# Altium PCB DUTBoard_Sandbox.PcbDoc (part 1 of 6)
Units mil, origin at the board's own origin, x right, y up, seen from the top; angles counter-clockwise.
Board outline 5475 x 5475 mil, 4 copper layers (Top Layer, Mid-Layer 1, Mid-Layer 2, Bottom Layer); 89 components, 507 nets, 1705 pads, 1204 vias.
Unrouted connection lines stored in the file: 6.
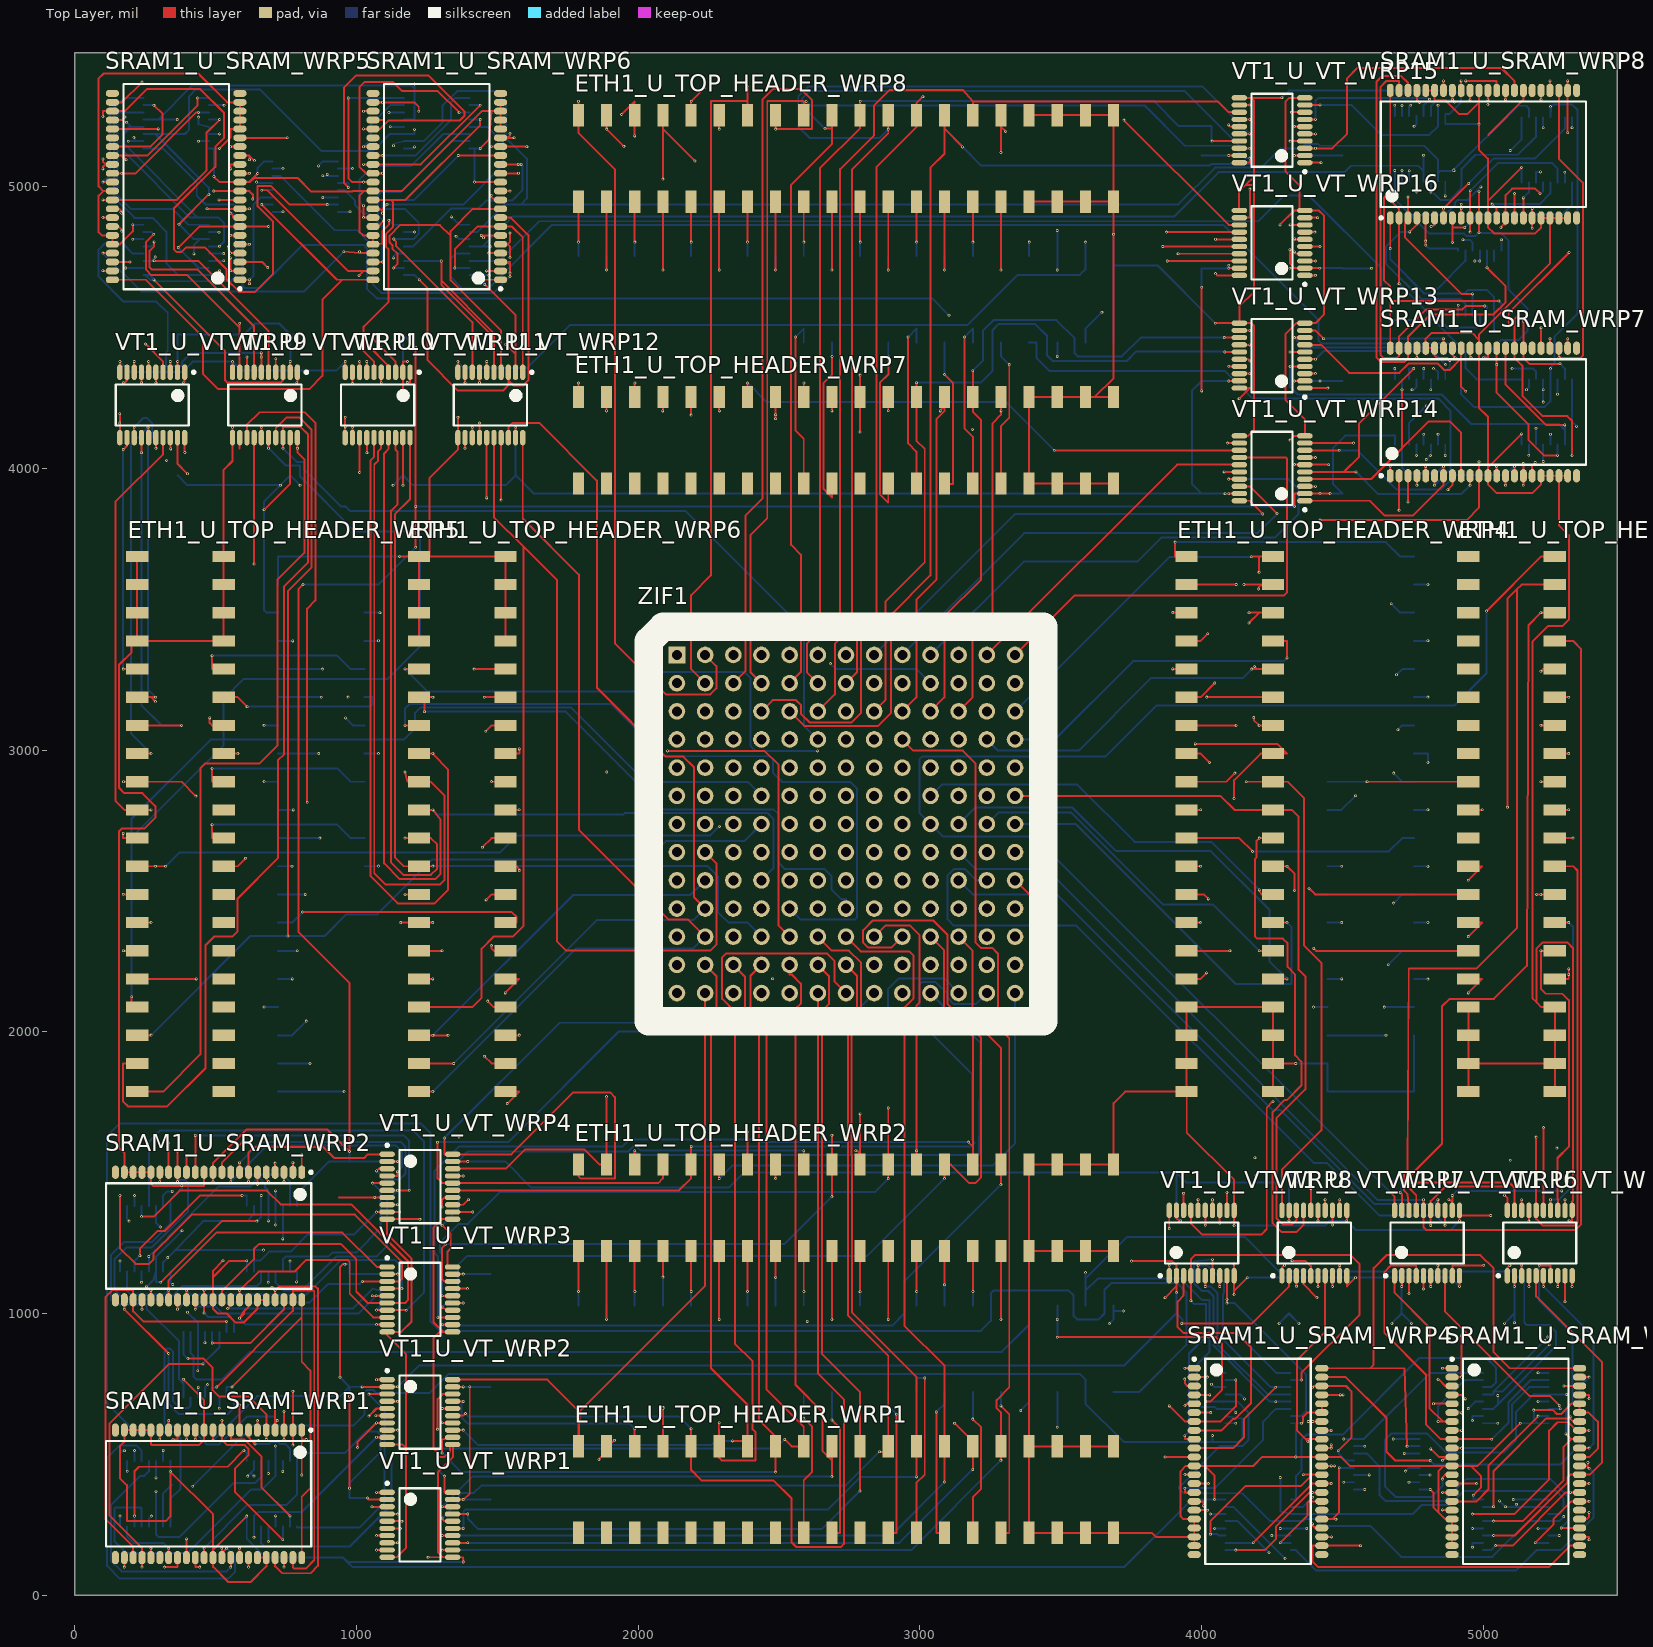
[diagram p0: Top Layer view]
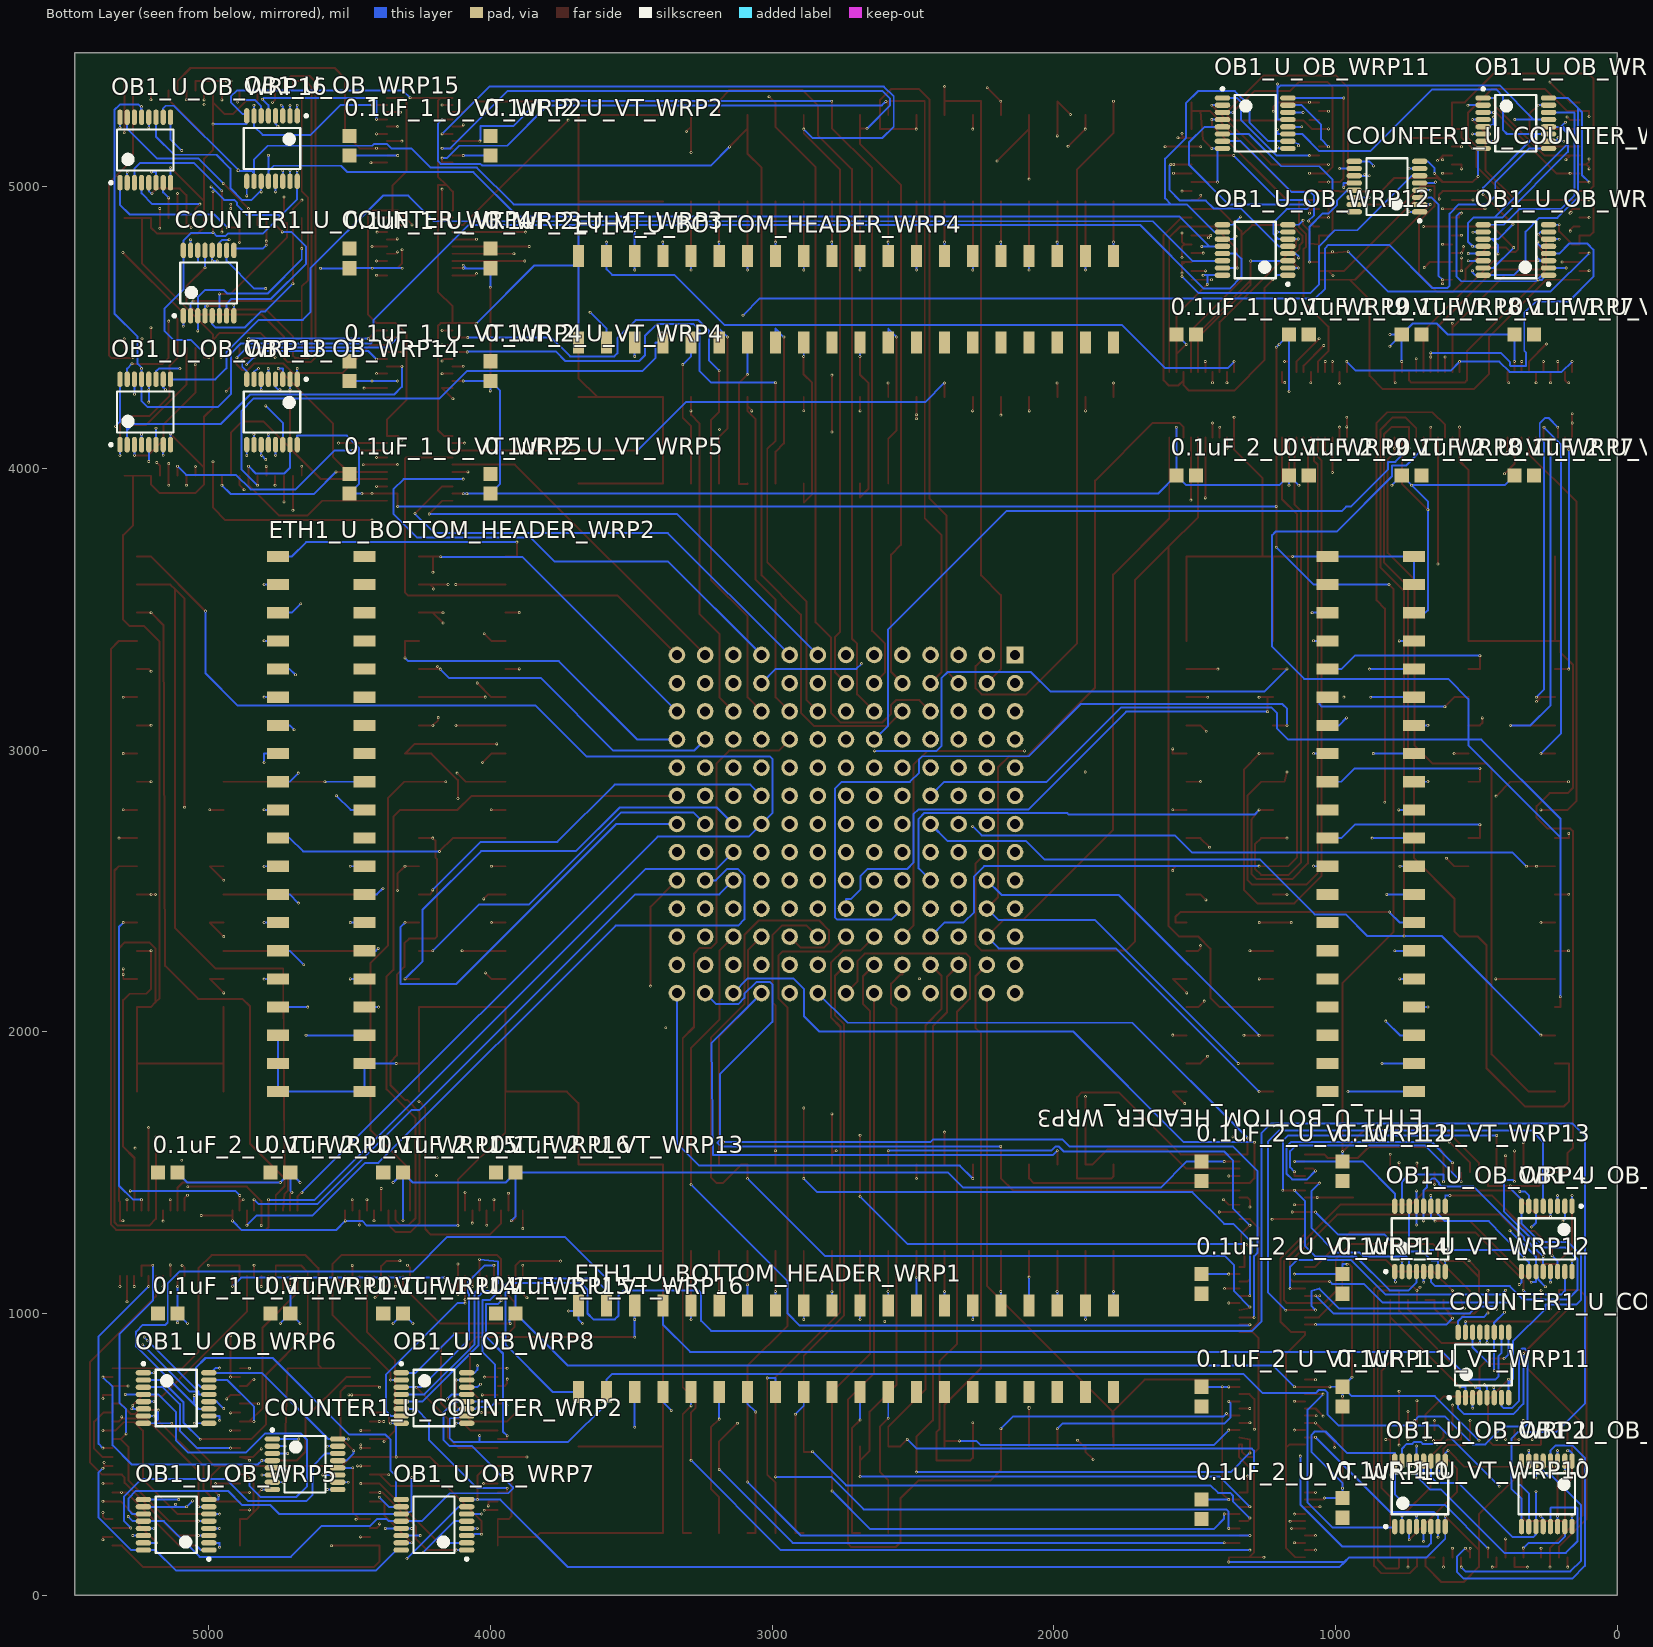
[diagram p1: Bottom Layer view, seen from below]
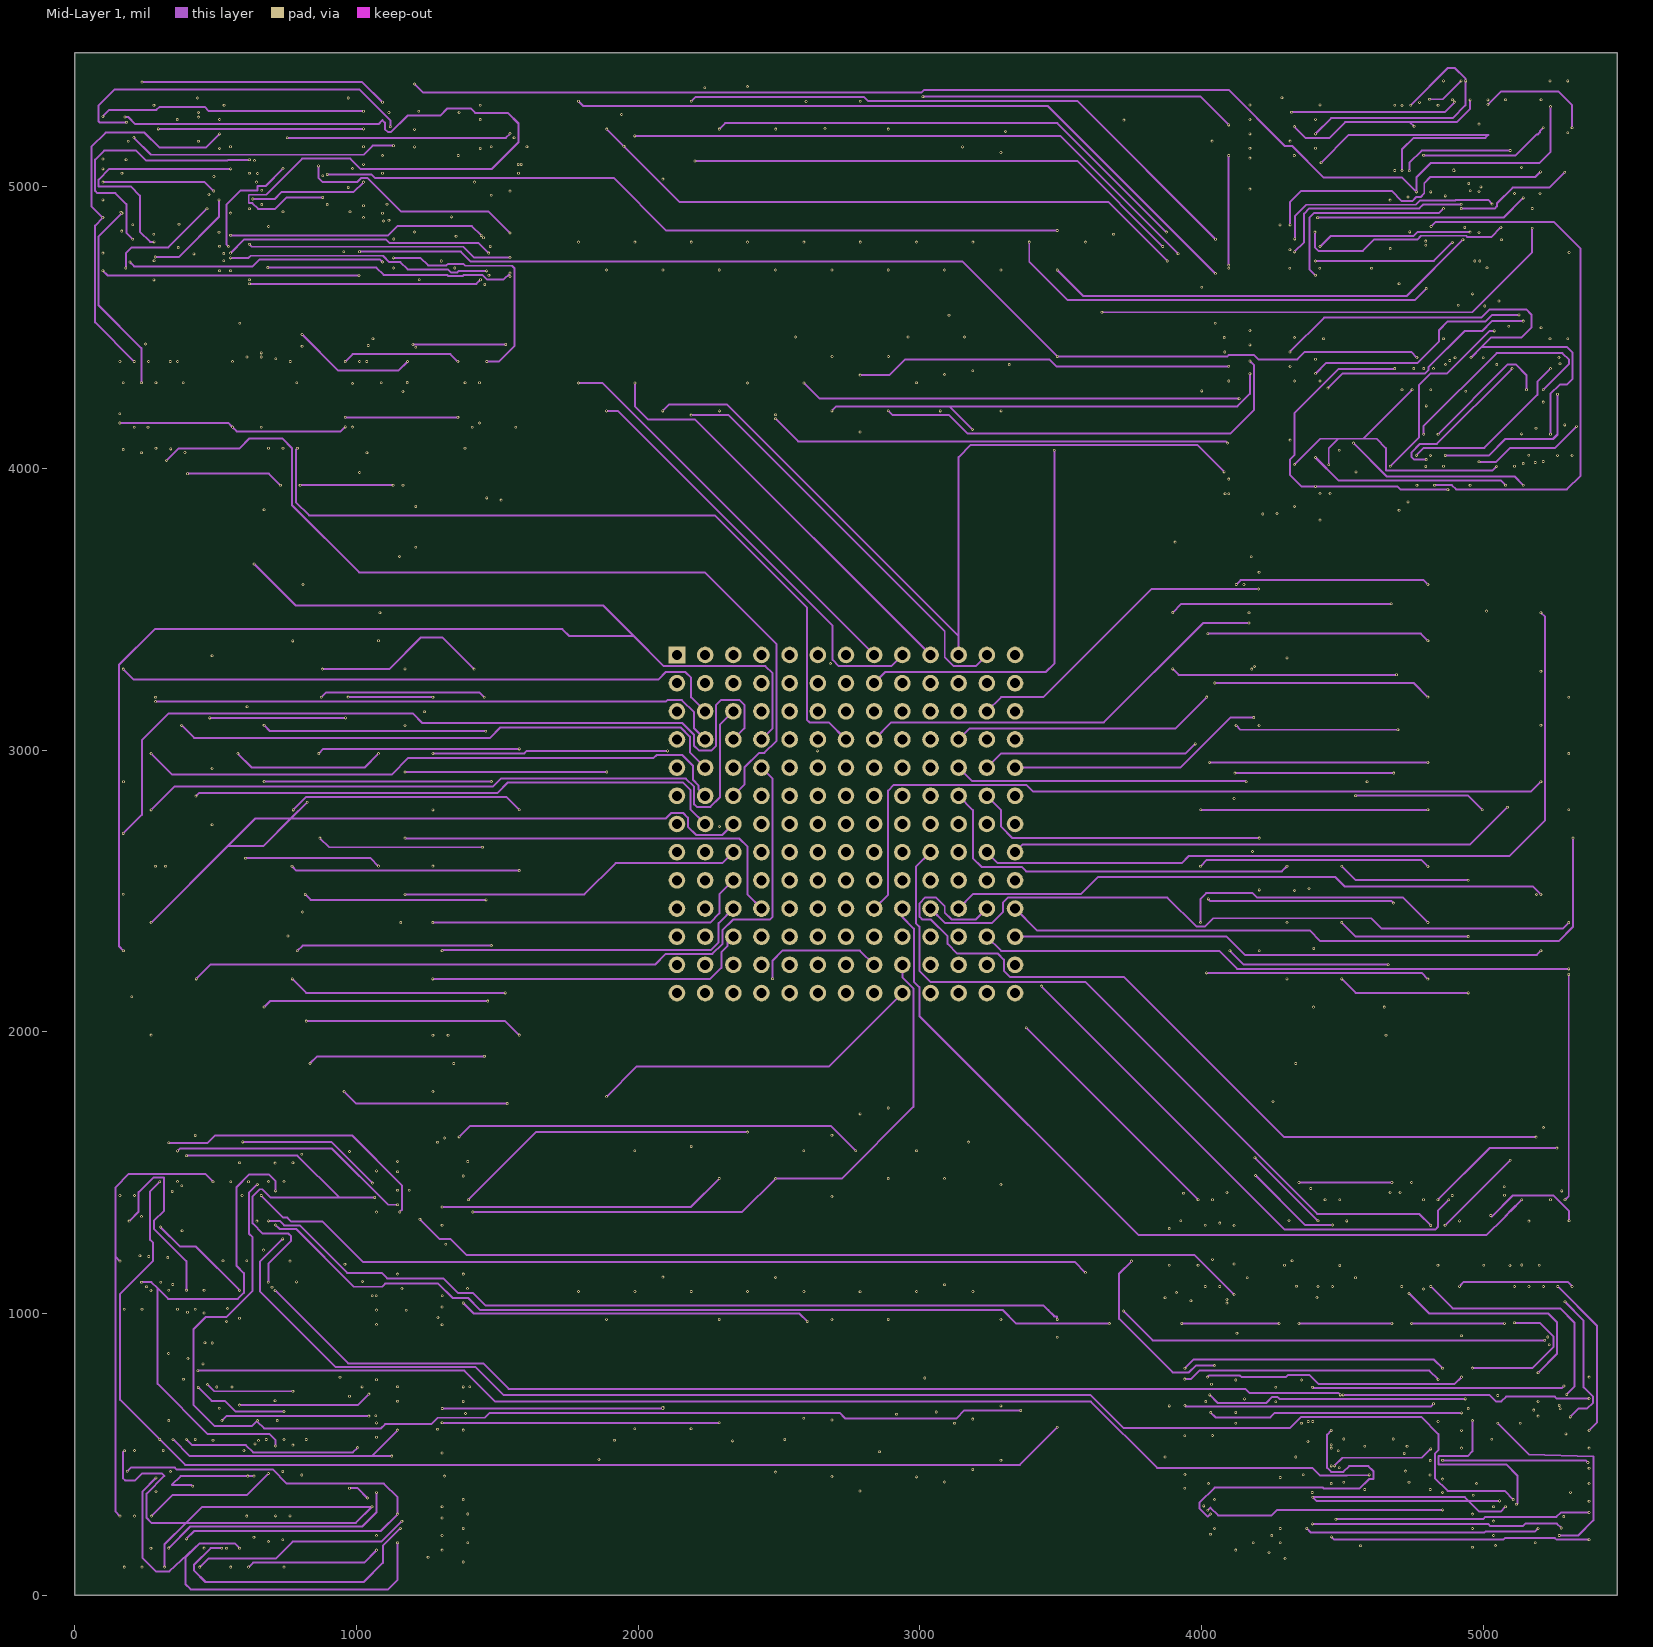
[diagram p2: Mid-Layer 1]
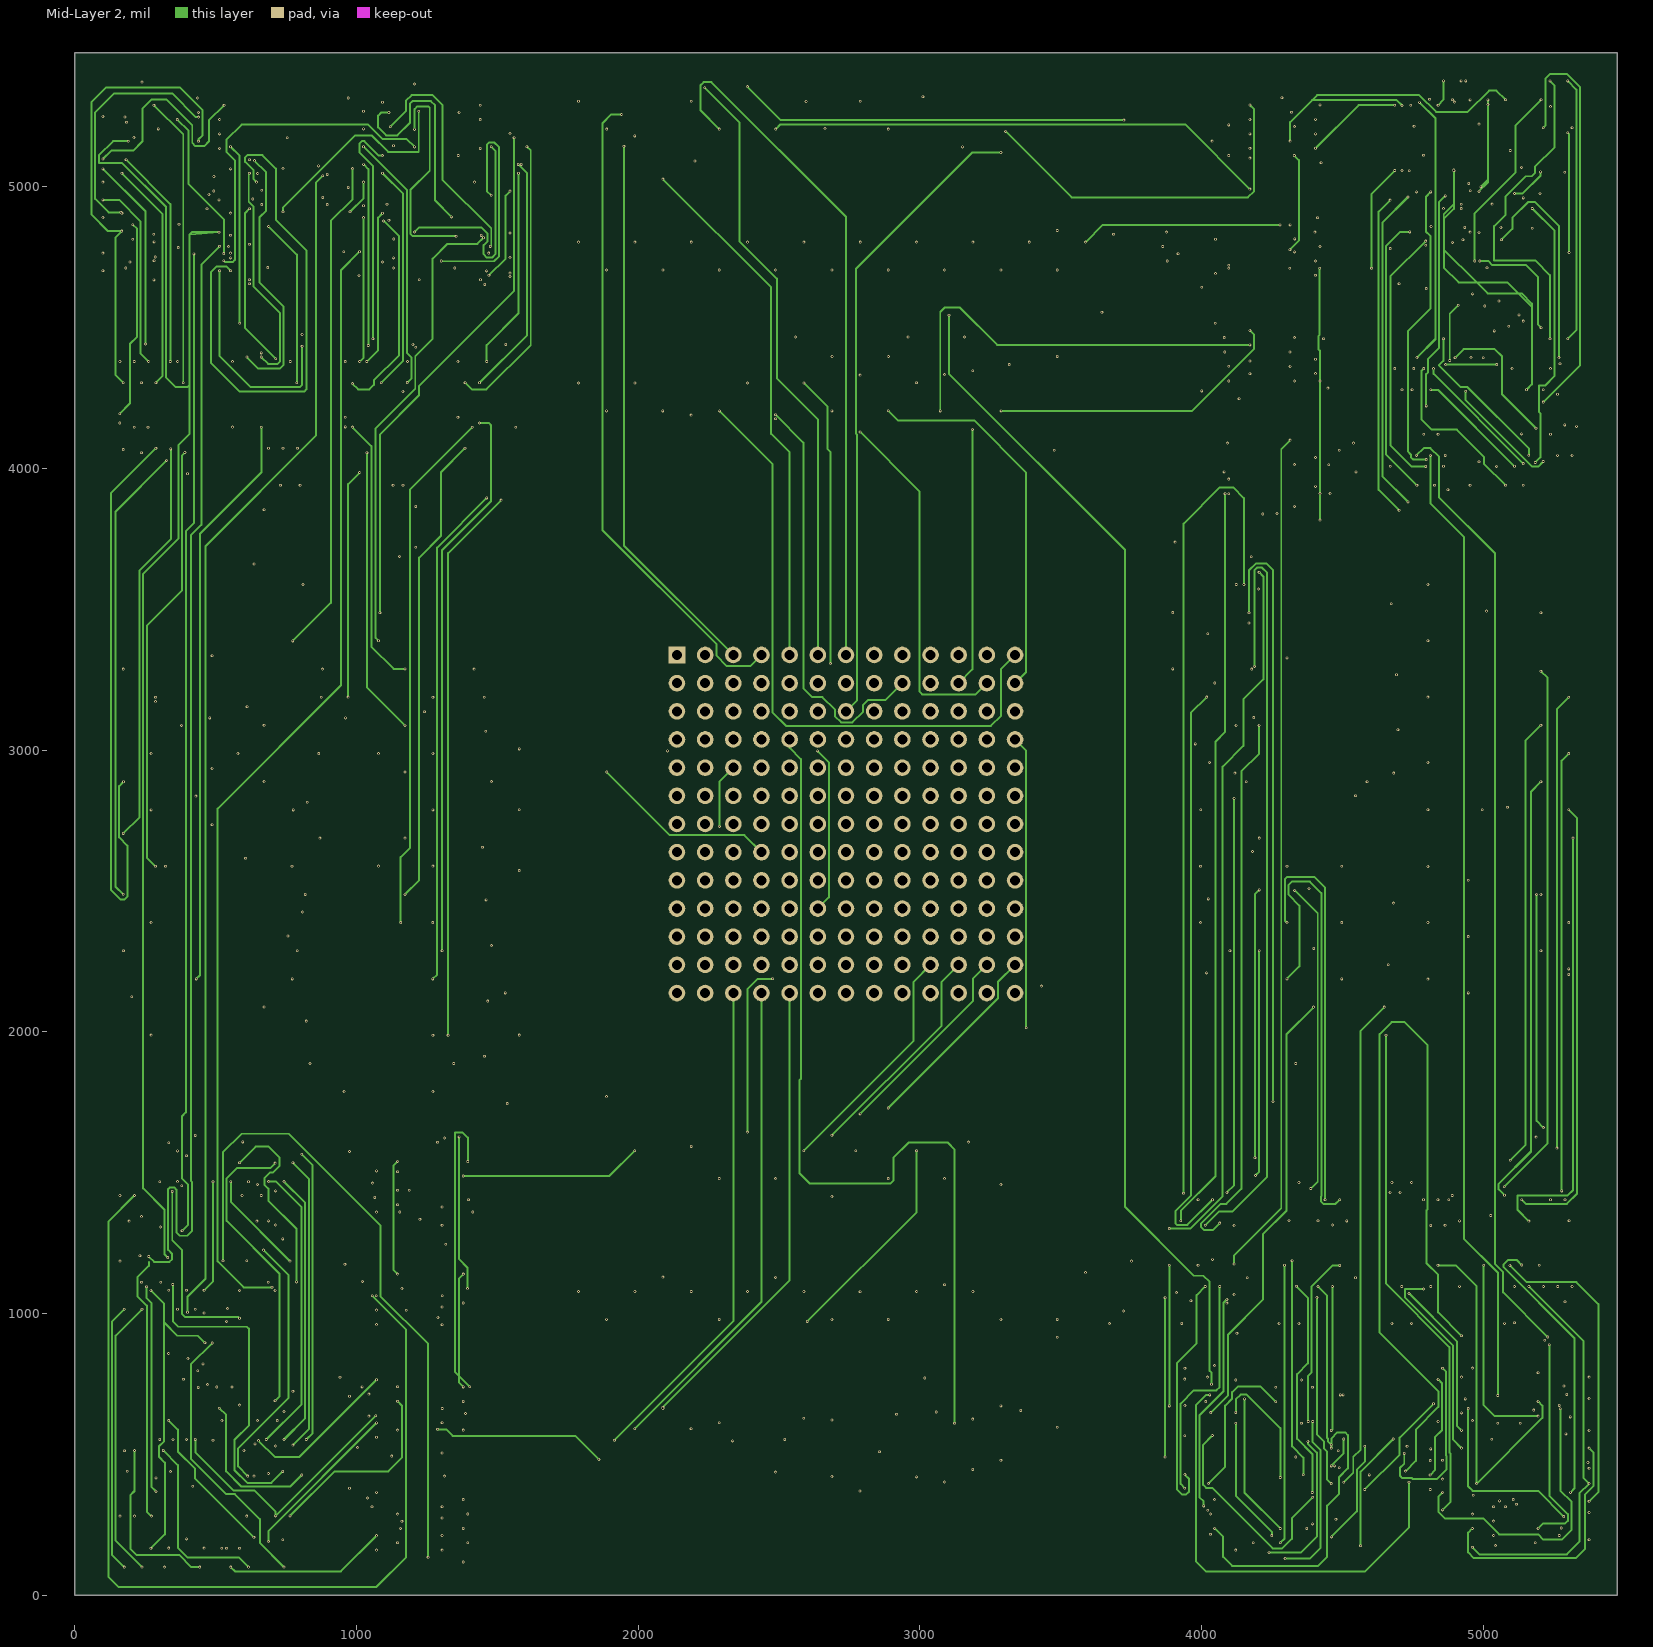
[diagram p3: Mid-Layer 2]
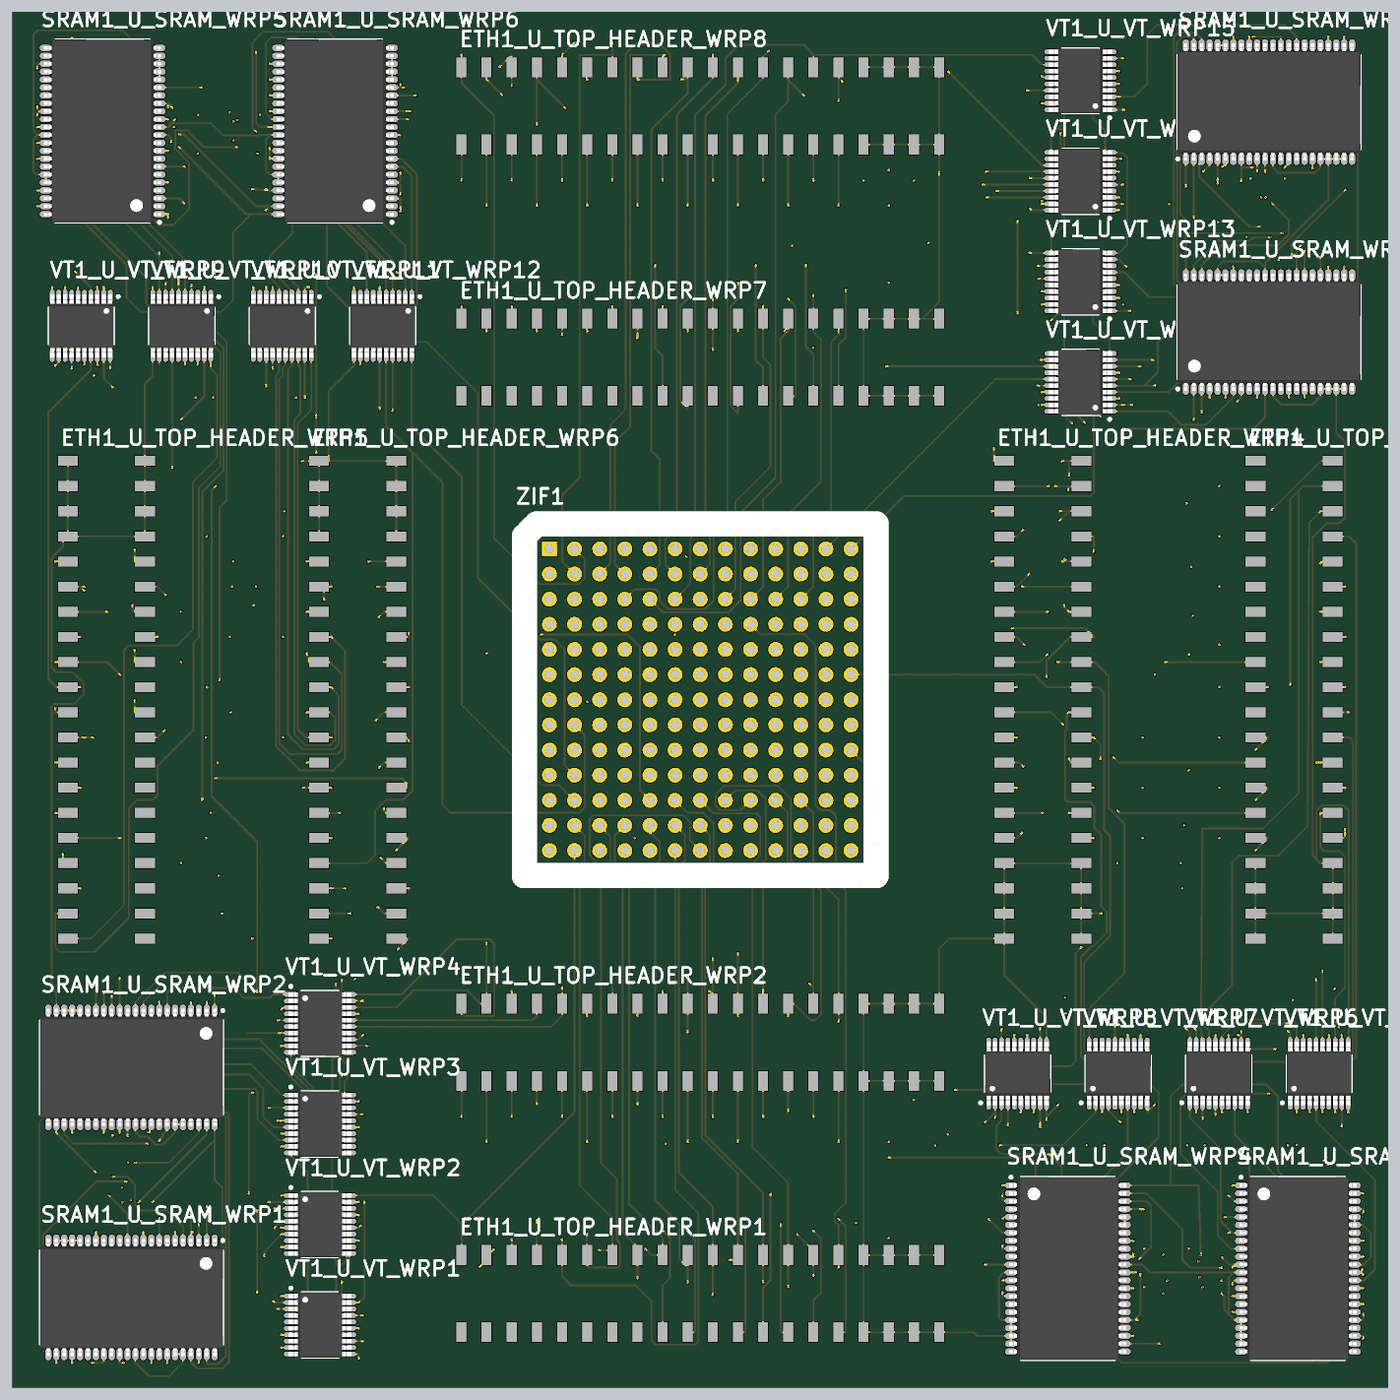
[diagram p9: 3D render of the assembled board from above, using the file's embedded part models]

## Layer stack, top to bottom
Top Solder: solder mask 0.4, Solder Resist, Dk 3.5
Top Layer: signal copper 1.4
Dielectric 1: dielectric 12.6, FR-4, Dk 4.8
Mid-Layer 1: signal copper 1.4
Dielectric2: dielectric 12.6, FR-4, Dk 4.8
Mid-Layer 2: signal copper 1.4
Dielectric3: dielectric 12.6, FR-4, Dk 4.8
Bottom Layer: signal copper 1.4
Bottom Solder: solder mask 0.4, Solder Resist, Dk 3.5

## Board outline
0,0 5475,0 5475,5475 0,5475

## Design rules (kind name [scope] priority, off if disabled: settings)
Clearance [All] p1: gap=6
PolygonConnect [All] p1: connectstyle=Relief reliefconductorwidth=10 reliefentries=4 polygonreliefangle="90 Angle" airgapwidth=10
RoutingVias [All] p1: holewidth=5 width=10 viastyle="Through Hole" minholewidth=28 minwidth=50 maxholewidth=28 maxwidth=50
SolderMaskExpansion [All] p1: expansion=4
Width [All] p1: maxlimit=7 minlimit=7 preferedwidth=7
29 further rules are at their usual default settings.

## Classes and differential pairs
channel class TOP_HEADER_WRP: U_TOP_HEADER_WRP1 U_TOP_HEADER_WRP2 U_TOP_HEADER_WRP3 U_TOP_HEADER_WRP4 U_TOP_HEADER_WRP5 U_TOP_HEADER_WRP6 U_TOP_HEADER_WRP7 U_TOP_HEADER_WRP8
channel class COMBINED_HEADER_WRP: U_COMBINED_HEADER_WRP1 U_COMBINED_HEADER_WRP2 U_COMBINED_HEADER_WRP3 U_COMBINED_HEADER_WRP4
channel class BOTTOM_HEADER_WRP: U_BOTTOM_HEADER_WRP1 U_BOTTOM_HEADER_WRP2 U_BOTTOM_HEADER_WRP3 U_BOTTOM_HEADER_WRP4
net class INSIDE_B[111..0]: INSIDE_B0 INSIDE_B1 INSIDE_B2 INSIDE_B3 INSIDE_B4 INSIDE_B5 INSIDE_B6 INSIDE_B7 INSIDE_B8 INSIDE_B9 INSIDE_B10 INSIDE_B11 INSIDE_B12 INSIDE_B13 INSIDE_B14 INSIDE_B15 INSIDE_B16 INSIDE_B17 INSIDE_B18 INSIDE_B19 INSIDE_B20 INSIDE_B21 INSIDE_B22 INSIDE_B23 INSIDE_B24 INSIDE_B25 INSIDE_B26 INSIDE_B27 INSIDE_B28 INSIDE_B29 INSIDE_B30 INSIDE_B31 INSIDE_B32 INSIDE_B33 INSIDE_B34 INSIDE_B35 INSIDE_B36 INSIDE_B37 INSIDE_B38 INSIDE_B39 INSIDE_B40 INSIDE_B41 INSIDE_B42 INSIDE_B43 INSIDE_B44 INSIDE_B45 INSIDE_B46 INSIDE_B47 INSIDE_B48 INSIDE_B49 INSIDE_B50 INSIDE_B51 INSIDE_B52 INSIDE_B53 INSIDE_B54 INSIDE_B55 INSIDE_B56 INSIDE_B57 INSIDE_B58 INSIDE_B59 INSIDE_B60 INSIDE_B61 INSIDE_B62 INSIDE_B63 INSIDE_B64 INSIDE_B65 INSIDE_B66 INSIDE_B67 INSIDE_B68 INSIDE_B69 INSIDE_B70 INSIDE_B71 INSIDE_B72 INSIDE_B73 INSIDE_B74 INSIDE_B75 INSIDE_B76 INSIDE_B77 INSIDE_B78 INSIDE_B79 INSIDE_B80 INSIDE_B81 INSIDE_B82 INSIDE_B83 INSIDE_B84 INSIDE_B85 INSIDE_B86 INSIDE_B87 INSIDE_B88 INSIDE_B89 INSIDE_B90 INSIDE_B91 INSIDE_B92 INSIDE_B93 INSIDE_B94 INSIDE_B95 INSIDE_B96 INSIDE_B97 INSIDE_B98 INSIDE_B99 INSIDE_B100 INSIDE_B101 INSIDE_B102 INSIDE_B103 INSIDE_B104 INSIDE_B105 INSIDE_B106 INSIDE_B107 INSIDE_B108 INSIDE_B109 INSIDE_B110 INSIDE_B111 INSIDE_B112 INSIDE_B113 INSIDE_B114 INSIDE_B115 INSIDE_B116 INSIDE_B117 INSIDE_B118 INSIDE_B119 INSIDE_B120 INSIDE_B121 INSIDE_B122 INSIDE_B123 INSIDE_B124 INSIDE_B125 INSIDE_B126 INSIDE_B127
component class U_TOP_HEADER_WRP8: ETH1_U_TOP_HEADER_WRP8
component class U_TOP_HEADER_WRP7: ETH1_U_TOP_HEADER_WRP7
component class U_TOP_HEADER_WRP6: ETH1_U_TOP_HEADER_WRP6
component class U_TOP_HEADER_WRP5: ETH1_U_TOP_HEADER_WRP5
component class U_TOP_HEADER_WRP4: ETH1_U_TOP_HEADER_WRP4
component class U_TOP_HEADER_WRP3: ETH1_U_TOP_HEADER_WRP3
component class U_TOP_HEADER_WRP2: ETH1_U_TOP_HEADER_WRP2
component class U_TOP_HEADER_WRP1: ETH1_U_TOP_HEADER_WRP1
component class U_BOTTOM_HEADER_WRP4: ETH1_U_BOTTOM_HEADER_WRP4
component class U_BOTTOM_HEADER_WRP3: ETH1_U_BOTTOM_HEADER_WRP3
component class U_BOTTOM_HEADER_WRP2: ETH1_U_BOTTOM_HEADER_WRP2
component class U_BOTTOM_HEADER_WRP1: ETH1_U_BOTTOM_HEADER_WRP1
channel class VT_WRP: U_VT_WRP1 U_VT_WRP2 U_VT_WRP3 U_VT_WRP4 U_VT_WRP5 U_VT_WRP6 U_VT_WRP7 U_VT_WRP8 U_VT_WRP9 U_VT_WRP10 U_VT_WRP11 U_VT_WRP12 U_VT_WRP13 U_VT_WRP14 U_VT_WRP15 U_VT_WRP16
channel class SRAM_WRP: U_SRAM_WRP1 U_SRAM_WRP2 U_SRAM_WRP3 U_SRAM_WRP4 U_SRAM_WRP5 U_SRAM_WRP6 U_SRAM_WRP7 U_SRAM_WRP8
channel class OB_WRP: U_OB_WRP1 U_OB_WRP2 U_OB_WRP3 U_OB_WRP4 U_OB_WRP5 U_OB_WRP6 U_OB_WRP7 U_OB_WRP8 U_OB_WRP9 U_OB_WRP10 U_OB_WRP11 U_OB_WRP12 U_OB_WRP13 U_OB_WRP14 U_OB_WRP15 U_OB_WRP16
channel class COUNTER_WRP: U_COUNTER_WRP1 U_COUNTER_WRP2 U_COUNTER_WRP3 U_COUNTER_WRP4
component class U_ZIF_WRP: ZIF1
component class U_VT_WRP16: 0.1uF_1_U_VT_WRP16 0.1uF_2_U_VT_WRP16 VT1_U_VT_WRP16
component class U_VT_WRP15: 0.1uF_1_U_VT_WRP15 0.1uF_2_U_VT_WRP15 VT1_U_VT_WRP15
component class U_VT_WRP14: 0.1uF_1_U_VT_WRP14 0.1uF_2_U_VT_WRP14 VT1_U_VT_WRP14
component class U_VT_WRP13: 0.1uF_1_U_VT_WRP13 0.1uF_2_U_VT_WRP13 VT1_U_VT_WRP13
component class U_VT_WRP12: 0.1uF_1_U_VT_WRP12 0.1uF_2_U_VT_WRP12 VT1_U_VT_WRP12
component class U_VT_WRP11: 0.1uF_1_U_VT_WRP11 0.1uF_2_U_VT_WRP11 VT1_U_VT_WRP11
component class U_VT_WRP10: 0.1uF_1_U_VT_WRP10 0.1uF_2_U_VT_WRP10 VT1_U_VT_WRP10
component class U_VT_WRP9: 0.1uF_1_U_VT_WRP9 0.1uF_2_U_VT_WRP9 VT1_U_VT_WRP9
component class U_VT_WRP8: 0.1uF_1_U_VT_WRP8 0.1uF_2_U_VT_WRP8 VT1_U_VT_WRP8
component class U_VT_WRP7: 0.1uF_1_U_VT_WRP7 0.1uF_2_U_VT_WRP7 VT1_U_VT_WRP7
component class U_VT_WRP6: 0.1uF_1_U_VT_WRP6 0.1uF_2_U_VT_WRP6 VT1_U_VT_WRP6
component class U_VT_WRP5: 0.1uF_1_U_VT_WRP5 0.1uF_2_U_VT_WRP5 VT1_U_VT_WRP5
component class U_VT_WRP4: 0.1uF_1_U_VT_WRP4 0.1uF_2_U_VT_WRP4 VT1_U_VT_WRP4
component class U_VT_WRP3: 0.1uF_1_U_VT_WRP3 0.1uF_2_U_VT_WRP3 VT1_U_VT_WRP3
component class U_VT_WRP2: 0.1uF_1_U_VT_WRP2 0.1uF_2_U_VT_WRP2 VT1_U_VT_WRP2
component class U_VT_WRP1: 0.1uF_1_U_VT_WRP1 0.1uF_2_U_VT_WRP1 VT1_U_VT_WRP1
component class U_SRAM_WRP8: SRAM1_U_SRAM_WRP8
component class U_SRAM_WRP7: SRAM1_U_SRAM_WRP7
component class U_SRAM_WRP6: SRAM1_U_SRAM_WRP6
component class U_SRAM_WRP5: SRAM1_U_SRAM_WRP5
component class U_SRAM_WRP4: SRAM1_U_SRAM_WRP4
component class U_SRAM_WRP3: SRAM1_U_SRAM_WRP3
component class U_SRAM_WRP2: SRAM1_U_SRAM_WRP2
component class U_SRAM_WRP1: SRAM1_U_SRAM_WRP1
component class U_OB_WRP16: OB1_U_OB_WRP16
component class U_OB_WRP15: OB1_U_OB_WRP15
component class U_OB_WRP14: OB1_U_OB_WRP14
component class U_OB_WRP13: OB1_U_OB_WRP13
component class U_OB_WRP12: OB1_U_OB_WRP12
component class U_OB_WRP11: OB1_U_OB_WRP11
component class U_OB_WRP10: OB1_U_OB_WRP10
component class U_OB_WRP9: OB1_U_OB_WRP9
component class U_OB_WRP8: OB1_U_OB_WRP8
component class U_OB_WRP7: OB1_U_OB_WRP7
component class U_OB_WRP6: OB1_U_OB_WRP6
component class U_OB_WRP5: OB1_U_OB_WRP5
component class U_OB_WRP4: OB1_U_OB_WRP4
component class U_OB_WRP3: OB1_U_OB_WRP3
component class U_OB_WRP2: OB1_U_OB_WRP2
component class U_OB_WRP1: OB1_U_OB_WRP1
component class U_COUNTER_WRP4: COUNTER1_U_COUNTER_WRP4
component class U_COUNTER_WRP3: COUNTER1_U_COUNTER_WRP3
component class U_COUNTER_WRP2: COUNTER1_U_COUNTER_WRP2
component class U_COUNTER_WRP1: COUNTER1_U_COUNTER_WRP1

## Components (designator, comment, footprint, x,y, rotation, side; value= is the part's Value field where it differs from the comment)
0.1uF_1_U_VT_WRP1 "0.1uF_0603" 0.1uF_0603 5145,1000 r0 bottom (schematic designator 0.1uF_1)
0.1uF_1_U_VT_WRP2 "0.1uF_0603" 0.1uF_0603 4500,5145 r90 bottom (schematic designator 0.1uF_1)
0.1uF_1_U_VT_WRP3 "0.1uF_0603" 0.1uF_0603 4500,4745 r90 bottom (schematic designator 0.1uF_1)
0.1uF_1_U_VT_WRP4 "0.1uF_0603" 0.1uF_0603 4500,4345 r90 bottom (schematic designator 0.1uF_1)
0.1uF_1_U_VT_WRP5 "0.1uF_0603" 0.1uF_0603 4500,3945 r90 bottom (schematic designator 0.1uF_1)
0.1uF_1_U_VT_WRP6 "0.1uF_0603" 0.1uF_0603 330,4475 r180 bottom (schematic designator 0.1uF_1)
0.1uF_1_U_VT_WRP7 "0.1uF_0603" 0.1uF_0603 730,4475 r180 bottom (schematic designator 0.1uF_1)
0.1uF_1_U_VT_WRP8 "0.1uF_0603" 0.1uF_0603 1130,4475 r180 bottom (schematic designator 0.1uF_1)
0.1uF_1_U_VT_WRP9 "0.1uF_0603" 0.1uF_0603 1530,4475 r180 bottom (schematic designator 0.1uF_1)
0.1uF_1_U_VT_WRP10 "0.1uF_0603" 0.1uF_0603 975,310 r270 bottom (schematic designator 0.1uF_1)
0.1uF_1_U_VT_WRP11 "0.1uF_0603" 0.1uF_0603 975,705 r270 bottom (schematic designator 0.1uF_1)
0.1uF_1_U_VT_WRP12 "0.1uF_0603" 0.1uF_0603 975,1105 r270 bottom (schematic designator 0.1uF_1)
0.1uF_1_U_VT_WRP13 "0.1uF_0603" 0.1uF_0603 975,1505 r270 bottom (schematic designator 0.1uF_1)
0.1uF_1_U_VT_WRP14 "0.1uF_0603" 0.1uF_0603 4745,1000 r0 bottom (schematic designator 0.1uF_1)
0.1uF_1_U_VT_WRP15 "0.1uF_0603" 0.1uF_0603 4345,1000 r0 bottom (schematic designator 0.1uF_1)
0.1uF_1_U_VT_WRP16 "0.1uF_0603" 0.1uF_0603 3945,1000 r0 bottom (schematic designator 0.1uF_1)
0.1uF_2_U_VT_WRP1 "0.1uF_0603" 0.1uF_0603 5145,1500 r0 bottom (schematic designator 0.1uF_2)
0.1uF_2_U_VT_WRP2 "0.1uF_0603" 0.1uF_0603 4000,5145 r90 bottom (schematic designator 0.1uF_2)
0.1uF_2_U_VT_WRP3 "0.1uF_0603" 0.1uF_0603 4000,4745 r90 bottom (schematic designator 0.1uF_2)
0.1uF_2_U_VT_WRP4 "0.1uF_0603" 0.1uF_0603 4000,4345 r90 bottom (schematic designator 0.1uF_2)
0.1uF_2_U_VT_WRP5 "0.1uF_0603" 0.1uF_0603 4000,3945 r90 bottom (schematic designator 0.1uF_2)
0.1uF_2_U_VT_WRP6 "0.1uF_0603" 0.1uF_0603 330,3975 r180 bottom (schematic designator 0.1uF_2)
0.1uF_2_U_VT_WRP7 "0.1uF_0603" 0.1uF_0603 730,3975 r180 bottom (schematic designator 0.1uF_2)
0.1uF_2_U_VT_WRP8 "0.1uF_0603" 0.1uF_0603 1130,3975 r180 bottom (schematic designator 0.1uF_2)
0.1uF_2_U_VT_WRP9 "0.1uF_0603" 0.1uF_0603 1530,3975 r180 bottom (schematic designator 0.1uF_2)
0.1uF_2_U_VT_WRP10 "0.1uF_0603" 0.1uF_0603 1475,305 r270 bottom (schematic designator 0.1uF_2)
0.1uF_2_U_VT_WRP11 "0.1uF_0603" 0.1uF_0603 1475,705 r270 bottom (schematic designator 0.1uF_2)
0.1uF_2_U_VT_WRP12 "0.1uF_0603" 0.1uF_0603 1475,1505 r270 bottom (schematic designator 0.1uF_2)
0.1uF_2_U_VT_WRP13 "0.1uF_0603" 0.1uF_0603 3945,1500 r0 bottom (schematic designator 0.1uF_2)
0.1uF_2_U_VT_WRP14 "0.1uF_0603" 0.1uF_0603 1475,1105 r270 bottom (schematic designator 0.1uF_2)
0.1uF_2_U_VT_WRP15 "0.1uF_0603" 0.1uF_0603 4745,1500 r0 bottom (schematic designator 0.1uF_2)
0.1uF_2_U_VT_WRP16 "0.1uF_0603" 0.1uF_0603 4345,1500 r0 bottom (schematic designator 0.1uF_2)
COUNTER1_U_COUNTER_WRP1 "74VHC4040FT(BJ)" COUNTER_TSSOP16 475,817.5 r90 bottom (schematic designator COUNTER1)
COUNTER1_U_COUNTER_WRP2 "74VHC4040FT(BJ)" COUNTER_TSSOP16 4657.5,465 r180 bottom (schematic designator COUNTER1)
COUNTER1_U_COUNTER_WRP3 "74VHC4040FT(BJ)" COUNTER_TSSOP16 817.5,5000 r0 bottom (schematic designator COUNTER1)
COUNTER1_U_COUNTER_WRP4 "74VHC4040FT(BJ)" COUNTER_TSSOP16 5000,4657.5 r90 bottom (schematic designator COUNTER1)
ETH1_U_BOTTOM_HEADER_WRP1 "ADAFRUIT_HEADER" FEMALE_HEADER_SMD 2737.5,875 r0 bottom (schematic designator ETH1)
ETH1_U_BOTTOM_HEADER_WRP2 "ADAFRUIT_HEADER" FEMALE_HEADER_SMD 4600,2737.5 r270 bottom (schematic designator ETH1)
ETH1_U_BOTTOM_HEADER_WRP3 "ADAFRUIT_HEADER" FEMALE_HEADER_SMD 875,2737.5 r90 bottom (schematic designator ETH1)
ETH1_U_BOTTOM_HEADER_WRP4 "ADAFRUIT_HEADER" FEMALE_HEADER_SMD 2737.5,4600 r0 bottom (schematic designator ETH1)
ETH1_U_TOP_HEADER_WRP1 "ADAFRUIT_HEADER" FEMALE_HEADER_SMD 2737.5,375 r0 top (schematic designator ETH1)
ETH1_U_TOP_HEADER_WRP2 "ADAFRUIT_HEADER" FEMALE_HEADER_SMD 2737.5,1375 r0 top (schematic designator ETH1)
ETH1_U_TOP_HEADER_WRP3 "ADAFRUIT_HEADER" FEMALE_HEADER_SMD 5100,2737.5 r270 top (schematic designator ETH1)
ETH1_U_TOP_HEADER_WRP4 "ADAFRUIT_HEADER" FEMALE_HEADER_SMD 4100,2737.5 r270 top (schematic designator ETH1)
ETH1_U_TOP_HEADER_WRP5 "ADAFRUIT_HEADER" FEMALE_HEADER_SMD 375,2737.5 r90 top (schematic designator ETH1)
ETH1_U_TOP_HEADER_WRP6 "ADAFRUIT_HEADER" FEMALE_HEADER_SMD 1375,2737.5 r90 top (schematic designator ETH1)
ETH1_U_TOP_HEADER_WRP7 "ADAFRUIT_HEADER" FEMALE_HEADER_SMD 2737.5,4100 r0 top (schematic designator ETH1)
ETH1_U_TOP_HEADER_WRP8 "ADAFRUIT_HEADER" FEMALE_HEADER_SMD 2737.5,5100 r0 top (schematic designator ETH1)
OB1_U_OB_WRP1 "74HC597PW,118" OB_TSSOP16 250,360 r270 bottom (schematic designator OB1)
OB1_U_OB_WRP2 "74HC597PW,118" OB_TSSOP16 700,360 r90 bottom (schematic designator OB1)
OB1_U_OB_WRP3 "74HC597PW,118" OB_TSSOP16 250,1265 r270 bottom (schematic designator OB1)
OB1_U_OB_WRP4 "74HC597PW,118" OB_TSSOP16 700,1265 r90 bottom (schematic designator OB1)
OB1_U_OB_WRP5 "74HC597PW,118" OB_TSSOP16 5115,250 r0 bottom (schematic designator OB1)
OB1_U_OB_WRP6 "74HC597PW,118" OB_TSSOP16 5115,700 r180 bottom (schematic designator OB1)
OB1_U_OB_WRP7 "74HC597PW,118" OB_TSSOP16 4200,250 r0 bottom (schematic designator OB1)
OB1_U_OB_WRP8 "74HC597PW,118" OB_TSSOP16 4200,700 r180 bottom (schematic designator OB1)
OB1_U_OB_WRP9 "74HC597PW,118" OB_TSSOP16 360,5225 r180 bottom (schematic designator OB1)
OB1_U_OB_WRP10 "74HC597PW,118" OB_TSSOP16 360,4775 r0 bottom (schematic designator OB1)
OB1_U_OB_WRP11 "74HC597PW,118" OB_TSSOP16 1285,5225 r180 bottom (schematic designator OB1)
OB1_U_OB_WRP12 "74HC597PW,118" OB_TSSOP16 1285,4775 r0 bottom (schematic designator OB1)
OB1_U_OB_WRP13 "74HC597PW,118" OB_TSSOP16 5225,4200 r90 bottom (schematic designator OB1)
OB1_U_OB_WRP14 "74HC597PW,118" OB_TSSOP16 4775,4200 r270 bottom (schematic designator OB1)
OB1_U_OB_WRP15 "74HC597PW,118" OB_TSSOP16 4775,5135 r270 bottom (schematic designator OB1)
OB1_U_OB_WRP16 "74HC597PW,118" OB_TSSOP16 5225,5130 r90 bottom (schematic designator OB1)
SRAM1_U_SRAM_WRP1 "71V016SA10PHG" SRAM_TSSOP44-II 475,360 r270 top (schematic designator SRAM1)
SRAM1_U_SRAM_WRP2 "71V016SA10PHG" SRAM_TSSOP44-II 475,1275 r270 top (schematic designator SRAM1)
SRAM1_U_SRAM_WRP3 "71V016SA10PHG" SRAM_TSSOP44-II 5115,475 r0 top (schematic designator SRAM1)
SRAM1_U_SRAM_WRP4 "71V016SA10PHG" SRAM_TSSOP44-II 4200,475 r0 top (schematic designator SRAM1)
SRAM1_U_SRAM_WRP5 "71V016SA10PHG" SRAM_TSSOP44-II 360,5000 r180 top (schematic designator SRAM1)
SRAM1_U_SRAM_WRP6 "71V016SA10PHG" SRAM_TSSOP44-II 1285,5000 r180 top (schematic designator SRAM1)
SRAM1_U_SRAM_WRP7 "71V016SA10PHG" SRAM_TSSOP44-II 5000,4200 r90 top (schematic designator SRAM1)
SRAM1_U_SRAM_WRP8 "71V016SA10PHG" SRAM_TSSOP44-II 5000,5115 r90 top (schematic designator SRAM1)
VT1_U_VT_WRP1 "MAX3012EUP+" VT_TSSOP20 1225,250 r0 top (schematic designator VT1)
VT1_U_VT_WRP2 "MAX3012EUP+" VT_TSSOP20 1225,650 r0 top (schematic designator VT1)
VT1_U_VT_WRP3 "MAX3012EUP+" VT_TSSOP20 1225,1050 r0 top (schematic designator VT1)
VT1_U_VT_WRP4 "MAX3012EUP+" VT_TSSOP20 1225,1450 r0 top (schematic designator VT1)
VT1_U_VT_WRP5 "MAX3012EUP+" VT_TSSOP20 5200,1250 r90 top (schematic designator VT1)
VT1_U_VT_WRP6 "MAX3012EUP+" VT_TSSOP20 4800,1250 r90 top (schematic designator VT1)
VT1_U_VT_WRP7 "MAX3012EUP+" VT_TSSOP20 4400,1250 r90 top (schematic designator VT1)
VT1_U_VT_WRP8 "MAX3012EUP+" VT_TSSOP20 4000,1250 r90 top (schematic designator VT1)
VT1_U_VT_WRP9 "MAX3012EUP+" VT_TSSOP20 275,4225 r270 top (schematic designator VT1)
VT1_U_VT_WRP10 "MAX3012EUP+" VT_TSSOP20 675,4225 r270 top (schematic designator VT1)
VT1_U_VT_WRP11 "MAX3012EUP+" VT_TSSOP20 1075,4225 r270 top (schematic designator VT1)
VT1_U_VT_WRP12 "MAX3012EUP+" VT_TSSOP20 1475,4225 r270 top (schematic designator VT1)
VT1_U_VT_WRP13 "MAX3012EUP+" VT_TSSOP20 4250,4400 r180 top (schematic designator VT1)
VT1_U_VT_WRP14 "MAX3012EUP+" VT_TSSOP20 4250,4000 r180 top (schematic designator VT1)
VT1_U_VT_WRP15 "MAX3012EUP+" VT_TSSOP20 4250,5200 r180 top (schematic designator VT1)
VT1_U_VT_WRP16 "MAX3012EUP+" VT_TSSOP20 4250,4800 r180 top (schematic designator VT1)
ZIF1 "200-6313-9UN-1900" ZIF_13x13 2737.5,2737.5 r0 top

## Footprints (in the part's own frame and the unit in brackets; to place one, negate y for a bottom-side part, rotate by r counter-clockwise, add the part's x,y. Pads: shape width x height; smd on the part's side, far side on the other; paste and mask are expansions set on the pad)
0.1uF_0603 [mil]
  rect 50x50 smd: 1(-35,0) 2(35,0)
COUNTER_TSSOP16 [mm] "TSOP, 16-Leads, Body 5.00x4.40mm, Pitch 0.65mm, IPC Medium Density"
  oval 1.4x0.475 smd: ADDR0(2.95,-2.275) ADDR1(-2.95,-1.625) ADDR2(-2.95,-0.975) ADDR3(-2.95,-0.325) ADDR4(-2.95,0.975) ADDR5(-2.95,1.625) ADDR6(-2.95,0.325) ADDR7(2.95,0.325) ADDR8(2.95,-0.325) ADDR9(2.95,0.975) ADDR10(2.95,1.625) ADDR11(-2.95,2.275) CLR(2.95,-0.975) GND(-2.95,-2.275) VCC(2.95,2.275) ~CLK(2.95,-1.625)
  silkscreen extent -3.07,-2.55 1.85,3.21, body extent -3.2,-2.55 3.2,2.55, height 1.2
FEMALE_HEADER_SMD [mm]
  rect 1x2 smd: 1(-24.13,-3.9) 2(-21.59,-3.9) 3(-19.05,-3.9) 4(-16.51,-3.9) 5(-13.97,-3.9) 6(-11.43,-3.9) 7(-8.89,-3.9) 8(-6.35,-3.9) 9(-3.81,-3.9) 10(-1.27,-3.9) 11(1.27,-3.9) 12(3.81,-3.9) 13(6.35,-3.9) 14(8.89,-3.9) 15(11.43,-3.9) 16(13.97,-3.9) 17(16.51,-3.9) 18(19.05,-3.9) 19(21.59,-3.9) 20(24.13,-3.9) 21(24.13,3.9) 22(21.59,3.9) 23(19.05,3.9) 24(16.51,3.9) 25(13.97,3.9) 26(11.43,3.9) 27(8.89,3.9) 28(6.35,3.9) 29(3.81,3.9) 30(1.27,3.9) 31(-1.27,3.9) 32(-3.81,3.9) 33(-6.35,3.9) 34(-8.89,3.9) 35(-11.43,3.9) 36(-13.97,3.9) 37(-16.51,3.9) 38(-19.05,3.9) 39(-21.59,3.9) 40(-24.13,3.9)
OB_TSSOP16 [mm] "TSOP, 16-Leads, Body 5.00x4.40mm, Pitch 0.65mm, IPC Medium Density"
  oval 1.4x0.475 smd: D0(2.95,1.625) D1(-2.95,2.275) D2(-2.95,1.625) D3(-2.95,0.975) D4(-2.95,0.325) D5(-2.95,-0.325) D6(-2.95,-0.975) D7(-2.95,-1.625) DS(2.95,0.975) GND(-2.95,-2.275) Q(2.95,-2.275) SHCP(2.95,-0.975) STCP(2.95,-0.325) VCC(2.95,2.275) ~MR(2.95,-1.625) ~PL(2.95,0.325)
  silkscreen extent -3.07,-2.55 1.85,3.21, body extent -3.2,-2.55 3.2,2.55, height 1.1
SRAM_TSSOP44-II [mm] "TSOP, 44-Leads, Body 18.41x10.16mm, Pitch 0.80mm, IPC Medium Density"
  oval 1.2x0.625 smd: ADDR0(-5.75,5.2) ADDR1(-5.75,6) ADDR2(-5.75,6.8) ADDR3(-5.75,7.6) ADDR4(-5.75,8.4) ADDR5(5.75,8.4) ADDR6(5.75,7.6) ADDR7(5.75,6.8) ADDR8(5.75,-5.2) ADDR9(5.75,-6) ADDR10(5.75,-6.8) ADDR11(5.75,-7.6) ADDR12(-5.75,-7.6) ADDR13(-5.75,-6.8) ADDR14(-5.75,-6) ADDR15(-5.75,-5.2) DATA0(-5.75,3.6) DATA1(-5.75,2.8) DATA2(-5.75,2) DATA3(-5.75,1.2) DATA4(-5.75,-1.2) DATA5(-5.75,-2) DATA6(-5.75,-2.8) DATA7(-5.75,-3.6) DATA8(5.75,-3.6) DATA9(5.75,-2.8) DATA10(5.75,-2) DATA11(5.75,-1.2) DATA12(5.75,1.2) DATA13(5.75,2) DATA14(5.75,2.8) DATA15(5.75,3.6) NC1(5.75,-8.4) NC2(5.75,-4.4) NC3(-5.75,-8.4) VDD(-5.75,0.4) VDD(5.75,-0.4) VSS(-5.75,-0.4) VSS(5.75,0.4) ~BHE(5.75,5.2) ~BLE(5.75,4.4) ~CS(-5.75,4.4) ~OE(5.75,6) ~WE(-5.75,-4.4)
  silkscreen extent -5.87,-9.25 4.75,9.35, body extent -5.92,-9.25 5.92,9.25, height 1.19
VT_TSSOP20 [mm] "TSOP, 20-Leads, Body 6.50x4.40mm, Pitch 0.65mm, IPC Medium Density"
  oval 1.4x0.475 smd: EN(-2.95,-2.925) GND(2.95,-2.925) IVCC0(2.95,2.925) IVCC1(2.95,1.625) IVCC2(2.95,0.975) IVCC3(2.95,0.325) IVCC4(2.95,-0.325) IVCC5(2.95,-0.975) IVCC6(2.95,-1.625) IVCC7(2.95,-2.275) OVL0(-2.95,2.925) OVL1(-2.95,1.625) OVL2(-2.95,0.975) OVL3(-2.95,0.325) OVL4(-2.95,-0.325) OVL5(-2.95,-0.975) OVL6(-2.95,-1.625) OVL7(-2.95,-2.275) VCC(2.95,2.275) VL(-2.95,2.275)
  silkscreen extent -3.07,-3.3 1.85,3.86, body extent -3.2,-3.3 3.2,3.3, height 1.1
ZIF_13x13 [mm]
  round 1.5 hole 0.9: 1(-12.7,15.24) 2(-10.16,15.24) 3(-7.62,15.24) 4(-5.08,15.24) 5(-2.54,15.24) 6(0,15.24) 7(-12.7,12.7) 8(-10.16,12.7) 9(-7.62,12.7) 10(-5.08,12.7) 11(-2.54,12.7) 12(0,12.7) 13(-7.62,10.16) 14(-5.08,10.16) 15(-2.54,10.16) 16(0,10.16) 17(2.54,15.24) 18(5.08,15.24) 19(7.62,15.24) 20(10.16,15.24) 21(12.7,15.24) 22(15.24,15.24) 23(2.54,12.7) 24(5.08,12.7) 25(7.62,12.7) 26(10.16,12.7) 27(12.7,12.7) 28(15.24,12.7) 29(2.54,10.16) 30(5.08,10.16) 31(7.62,10.16) 32(10.16,10.16) 33(-12.7,-10.16) 34(-12.7,-7.62) 35(-12.7,-5.08) 36(-12.7,-2.54) 37(-10.16,-10.16) 38(-10.16,-7.62) 39(-10.16,-5.08) 40(-10.16,-2.54) 41(-7.62,-10.16) 42(-7.62,-7.62) 43(-7.62,-5.08) 44(-7.62,-2.54) 45(-5.08,-10.16) 46(-5.08,-7.62) 47(0,-7.62) 48(-2.54,-7.62) 49(0,7.62) 50(-2.54,7.62) 51(-7.62,0) 52(-7.62,2.54) 53(-7.62,5.08) 54(-7.62,7.62) 55(-10.16,0) 56(-10.16,2.54) 57(-10.16,5.08) 58(-10.16,7.62) 59(-10.16,10.16) 60(-12.7,0) 61(-12.7,2.54) 62(-12.7,5.08) 63(-12.7,7.62) 64(-12.7,10.16) 65(15.24,10.16) 66(12.7,10.16) 67(2.54,7.62) 68(15.24,7.62) 69(12.7,7.62) 70(10.16,7.62) 71(15.24,5.08) 72(12.7,5.08) 73(10.16,5.08) 74(15.24,2.54) 75(12.7,2.54) 76(10.16,2.54) 77(7.62,2.54) 78(15.24,0) 79(12.7,0) 80(10.16,0) 81(7.62,0) 82(15.24,-2.54) 83(12.7,-2.54) 84(10.16,-2.54) 85(7.62,-2.54) 86(10.16,-5.08) 87(12.7,-5.08) 88(15.24,-5.08) 89(2.54,-7.62) 90(5.08,-7.62) 91(15.24,-7.62) 92(12.7,-7.62) 93(10.16,-7.62) 94(7.62,-7.62) 95(15.24,-10.16) 96(12.7,-10.16) 97(2.54,-15.24) 98(5.08,-15.24) 99(7.62,-15.24) 100(10.16,-15.24) 101(12.7,-15.24) 102(15.24,-15.24) 103(2.54,-12.7) 104(5.08,-12.7) 105(7.62,-12.7) 106(10.16,-12.7) 107(12.7,-12.7) 108(15.24,-12.7) 109(2.54,-10.16) 110(5.08,-10.16) 111(7.62,-10.16) 112(10.16,-10.16) 113(-12.7,-15.24) 114(-10.16,-15.24) 115(-7.62,-15.24) 116(-5.08,-15.24) 117(-2.54,-15.24) 118(0,-15.24) 119(-12.7,-12.7) 120(-10.16,-12.7) 121(-7.62,-12.7) 122(-5.08,-12.7) 123(-2.54,-12.7) 124(0,-12.7) 125(-2.54,-10.16) 126(0,-10.16) 127(-5.08,7.62) 128(5.08,7.62) 129(7.62,7.62) 130(-5.08,5.08) 131(-2.54,5.08) 132(0,5.08) 133(2.54,5.08) 134(5.08,5.08) 135(7.62,5.08) 136(-5.08,2.54) 137(-2.54,2.54) 138(0,2.54) 139(2.54,2.54) 140(5.08,2.54) 141(-5.08,0) 142(-2.54,0) 143(0,0) 144(2.54,0) 145(5.08,0) 146(-5.08,-2.54) 147(-2.54,-2.54) 148(0,-2.54) 149(2.54,-2.54) 150(5.08,-2.54) 151(-5.08,-5.08) 152(-2.54,-5.08) 153(0,-5.08) 154(2.54,-5.08) 155(5.08,-5.08) 156(7.62,-5.08) 157(-15.24,-15.24) 158(-15.24,-12.7) 159(-15.24,-10.16) 160(-15.24,-7.62) 161(-15.24,-5.08) 162(-15.24,-2.54) 163(-15.24,0) 164(-15.24,2.54) 165(-15.24,5.08) 166(-15.24,7.62) 167(-15.24,10.16) 168(-15.24,12.7)
  rect 1.5x1.5 hole 0.9: 169(-15.24,15.24)
  silkscreen extent -17.78,-17.78 17.78,17.78

## Part data
COUNTER1_U_COUNTER_WRP1 COUNTER1_U_COUNTER_WRP2 COUNTER1_U_COUNTER_WRP3 COUNTER1_U_COUNTER_WRP4: "IC COUNTER BIN 12STAGE 16-TSSOP"
ETH1_U_BOTTOM_HEADER_WRP1 ETH1_U_BOTTOM_HEADER_WRP2 ETH1_U_BOTTOM_HEADER_WRP3 ETH1_U_BOTTOM_HEADER_WRP4 ETH1_U_TOP_HEADER_WRP1 ETH1_U_TOP_HEADER_WRP2 ETH1_U_TOP_HEADER_WRP3 ETH1_U_TOP_HEADER_WRP4 ETH1_U_TOP_HEADER_WRP5 ETH1_U_TOP_HEADER_WRP6 ETH1_U_TOP_HEADER_WRP7 ETH1_U_TOP_HEADER_WRP8: "Extra tall female header (SMD)"
OB1_U_OB_WRP1 OB1_U_OB_WRP2 OB1_U_OB_WRP3 OB1_U_OB_WRP4 OB1_U_OB_WRP5 OB1_U_OB_WRP6 OB1_U_OB_WRP7 OB1_U_OB_WRP8 OB1_U_OB_WRP9 OB1_U_OB_WRP10 OB1_U_OB_WRP11 OB1_U_OB_WRP12 OB1_U_OB_WRP13 OB1_U_OB_WRP14 OB1_U_OB_WRP15 OB1_U_OB_WRP16: "IC 8BIT SHIFT REGISTER 16TSSOP"
SRAM1_U_SRAM_WRP1 SRAM1_U_SRAM_WRP2 SRAM1_U_SRAM_WRP3 SRAM1_U_SRAM_WRP4 SRAM1_U_SRAM_WRP5 SRAM1_U_SRAM_WRP6 SRAM1_U_SRAM_WRP7 SRAM1_U_SRAM_WRP8: "IC SRAM 1MBIT 10NS 44TSOP"
VT1_U_VT_WRP1 VT1_U_VT_WRP2 VT1_U_VT_WRP3 VT1_U_VT_WRP4 VT1_U_VT_WRP5 VT1_U_VT_WRP6 VT1_U_VT_WRP7 VT1_U_VT_WRP8 VT1_U_VT_WRP9 VT1_U_VT_WRP10 VT1_U_VT_WRP11 VT1_U_VT_WRP12 VT1_U_VT_WRP13 VT1_U_VT_WRP14 VT1_U_VT_WRP15 VT1_U_VT_WRP16: "IC TRANSLATOR LEVEL 8CH 20-TSSOP"
ZIF1: "CONN SOCKET PGA ZIF 169POS GOLD"

## Via types
v1: diameter 10, hole 5, Top Layer to Bottom Layer, 1204 vias

## Nets (pads, with @x,y where several pads share a name; then routed paths per layer and width w, separated by ;. In a path a pad name is that pad's centre, name@x,y a point inside that pad or via, vN(x,y) a via of type N, cw(c..) or ccw(c..) an arc to the next point about the centre after c; other vN are vias at no path point)
3V3: 0.1uF_1_U_VT_WRP1.1 0.1uF_1_U_VT_WRP2.1 0.1uF_1_U_VT_WRP3.1 0.1uF_1_U_VT_WRP4.1 0.1uF_1_U_VT_WRP5.1 0.1uF_1_U_VT_WRP6.1 0.1uF_1_U_VT_WRP7.1 0.1uF_1_U_VT_WRP8.1 0.1uF_1_U_VT_WRP9.1 0.1uF_1_U_VT_WRP10.1 0.1uF_1_U_VT_WRP11.1 0.1uF_1_U_VT_WRP12.1 0.1uF_1_U_VT_WRP13.1 0.1uF_1_U_VT_WRP14.1 0.1uF_1_U_VT_WRP15.1 0.1uF_1_U_VT_WRP16.1 COUNTER1_U_COUNTER_WRP1.VCC COUNTER1_U_COUNTER_WRP2.VCC COUNTER1_U_COUNTER_WRP3.VCC COUNTER1_U_COUNTER_WRP4.VCC ETH1_U_BOTTOM_HEADER_WRP3.22 OB1_U_OB_WRP1.VCC OB1_U_OB_WRP2.VCC OB1_U_OB_WRP3.VCC OB1_U_OB_WRP4.VCC OB1_U_OB_WRP5.VCC OB1_U_OB_WRP6.VCC OB1_U_OB_WRP7.VCC OB1_U_OB_WRP8.VCC OB1_U_OB_WRP9.VCC OB1_U_OB_WRP10.VCC OB1_U_OB_WRP11.VCC OB1_U_OB_WRP12.VCC OB1_U_OB_WRP13.VCC OB1_U_OB_WRP14.VCC OB1_U_OB_WRP15.VCC OB1_U_OB_WRP16.VCC SRAM1_U_SRAM_WRP1.VDD SRAM1_U_SRAM_WRP2.VDD SRAM1_U_SRAM_WRP3.VDD SRAM1_U_SRAM_WRP4.VDD SRAM1_U_SRAM_WRP5.VDD SRAM1_U_SRAM_WRP6.VDD SRAM1_U_SRAM_WRP7.VDD SRAM1_U_SRAM_WRP8.VDD VT1_U_VT_WRP1.VL VT1_U_VT_WRP2.VL VT1_U_VT_WRP3.VL VT1_U_VT_WRP4.VL VT1_U_VT_WRP5.VL VT1_U_VT_WRP6.VL VT1_U_VT_WRP7.VL VT1_U_VT_WRP8.VL VT1_U_VT_WRP9.VL VT1_U_VT_WRP10.VL VT1_U_VT_WRP11.VL VT1_U_VT_WRP12.VL VT1_U_VT_WRP13.VL VT1_U_VT_WRP14.VL VT1_U_VT_WRP15.VL VT1_U_VT_WRP16.VL | length 38079.4
  Top Layer w7: v1(100,5015.75) SRAM1_U_SRAM_WRP5.VDD@133.62,5015.75 ; VT1_U_VT_WRP9.VL@364.57,4341.14 364.57,4378.57 v1(365,4379) ; SRAM1_U_SRAM_WRP1.VDD@459.25,133.62 v1(459.25,167.24) ; v1(459.25,1001.86) SRAM1_U_SRAM_WRP2.VDD@459.25,1048.62 v1(459.25,1082.24) ; v1(490.75,550.25) SRAM1_U_SRAM_WRP1.VDD@490.75,586.38 ; v1(490.75,1467.76) SRAM1_U_SRAM_WRP2.VDD@490.75,1501.38 490.75,1535 608.75,1653 897,1653 v1(975,1575) 975,2174 794,2355 794,3571.5 v1(810,3587.5) ; v1(493,4984.25) SRAM1_U_SRAM_WRP5.VDD@586.38,4984.25 619.75,4984.25 632,4972 v1(632,4956) ; VT1_U_VT_WRP10.VL@764.57,4341.14 764.57,4378.57 v1(765,4379) ; v1(941.5,773.5) 941.5,1164.5 952,1175 v1(959,1175) ; v1(971,5314.57) 971,5030 985.25,5015.75 v1(1025,5015.75) SRAM1_U_SRAM_WRP6.VDD@1058.62,5015.75 ; v1(975,380) v1(975,706.5) ; v1(1019.88,739.57) VT1_U_VT_WRP2.VL@1108.86,739.57 1145.57,739.57 v1(1146,740) ; v1(1039,345) 1044.43,339.57 VT1_U_VT_WRP1.VL@1108.86,339.57 ; VT1_U_VT_WRP3.VL@1108.86,1139.57 1145.57,1139.57 v1(1146,1140) ; VT1_U_VT_WRP4.VL@1108.86,1539.57 1145.57,1539.57 v1(1146,1540) ; v1(1164.57,4273) VT1_U_VT_WRP11.VL@1164.57,4341.14 1164.57,4379 v1(1181,4379) ; v1(1210,3720) v1(1210,3865) v1(1210,4430) ; v1(1455,4653) 1564.57,4543.43 1564.57,4405.43 ; SRAM1_U_SRAM_WRP6.VDD@1511.38,4984.25 1544.75,4984.25 v1(1545,4984) ; v1(1530,4440) 1564.57,4405.43 ; VT1_U_VT_WRP12.VL@1564.57,4341.14 1564.57,4405.43 ; v1(3751,1186) 3895.43,1186 3910.43,1171 VT1_U_VT_WRP8.VL@3910.43,1133.86 3910.43,1096.43 ; v1(3870,490.75) SRAM1_U_SRAM_WRP4.VDD@3973.62,490.75 ; v1(3870,1056) 3910.43,1096.43 ; v1(3910.43,1074.38) 3910.43,1096.43 ; v1(3929,965) 4179.43,965 4310.43,1096 VT1_U_VT_WRP7.VL@4310.43,1133.86 ; v1(4312.58,4710.43) 4330.57,4710.43 ; v1(4313,4776) 4313,4728 4330.57,4710.43 ; v1(4328.58,5110.43) VT1_U_VT_WRP15.VL@4366.14,5110.43 ; v1(4329,3865) 4329,3910.43 VT1_U_VT_WRP14.VL@4366.14,3910.43 v1(4420,3910.43) v1(4456,3910.43) ; v1(4329,4310) 4329.43,4310.43 VT1_U_VT_WRP13.VL@4366.14,4310.43 ; v1(4419,4710.43) VT1_U_VT_WRP16.VL@4366.14,4710.43 4330.57,4710.43 ; v1(4420,3816) 4940.25,3816 4984.25,3860 SRAM1_U_SRAM_WRP7.VDD@4984.25,3973.62 v1(4984.25,4023.24) ; SRAM1_U_SRAM_WRP4.VDD@4426.38,459.25 v1(4460,459.25) v1(4471.14,459.25) ; v1(4710,1096) 4710.43,1096.43 VT1_U_VT_WRP6.VL@4710.43,1133.86 ; v1(4813.25,519.5) 4842,490.75 SRAM1_U_SRAM_WRP3.VDD@4888.62,490.75 4855,481.75 v1(4855,479) ; v1@4984.25,4836 v1(4984.25,4837.25) SRAM1_U_SRAM_WRP8.VDD@4984.25,4888.62 v1(4984.25,4983) ; v1(4999.75,4392.76) 5015.75,4392.76 SRAM1_U_SRAM_WRP7.VDD@5015.75,4426.38 ; v1(5015.75,5307.76) SRAM1_U_SRAM_WRP8.VDD@5015.75,5341.38 ; v1(5110,1096) 5110.43,1096.43 VT1_U_VT_WRP5.VL@5110.43,1133.86 ; v1(5371,471) 5368.87,457.13 ; v1(5375,451) 5368.87,457.13 ; 5368.87,457.13 5366.75,459.25 SRAM1_U_SRAM_WRP3.VDD@5341.38,459.25 5368.87,457.13
  Mid-Layer 1 w7: v1(100,5015.75) 100.25,5016 461.25,5016 v1(493,4984.25) ; v1(160.43,281) 145,296.43 145,1201.43 ; v1(160.43,1186) 145,1201.43 ; v1(490.75,1467.76) 463.23,1495.27 192.27,1495.27 145,1448 145,1201.43 ; v1(632,4956) 709.56,4956 733.56,4980 989.25,4980 v1(1025,5015.75) ; v1(807,4475) 935,4347 1149,4347 v1(1181,4379) ; v1(975,380) 1004,380 v1(1039,345) ; v1(1200,4440) v1(1530,4440) ; v1(3751,1186) 3707,1142 3707,981 3897,791 3955,791 3979,815 v1(4046,815) ; v1(3929,965) v1(4275,965) ; v1(4345,965) v1(4675,965) ; v1(4471.14,459.25) 4499.89,488 4781.75,488 v1(4813.25,519.5) ; v1(4745,965) v1(5075,965) ; v1(4855,479) 5363,479 v1(5371,471) ; v1(4961,806) 5173,806 5249,882 5249,918 5200,967 v1(5110,967) ; v1(4984.25,4023.24) 5045.24,4023.24 5094,4072 5253.57,4072 v1(5330.57,4149) ; v1(5016,5291) 5063,5338 5265,5338 5315,5288 v1(5315,5209)
  Mid-Layer 2 w7: v1(459.25,1082.24) 490.75,1113.74 v1(490.75,1467.76) ; v1(514,4701.43) 514,4398 624,4288 799,4288 807,4296 v1(807,4433) ; v1(977,4910.43) 1025,4958.43 v1(1025,5015.75) ; v1(1146,1140) 1131,1155 1131,1525 v1(1146,1540) ; v1(1470,4685.43) 1529,4744.43 1529,4968 v1(1545,4984) ; v1(3870,490.75) v1(3870,1056) ; v1(4313,4776) 4345,4808 4345,5094 v1(4329,5110) ; v1(4419,4710.43) 4419,4474 4414,4469 4414,4423 4420,4417 v1(4420,4310) v1(4420,3910.43) v1(4420,3816) ; v1(4460,459.25) 4504,503.25 v1(4504,554.57) ; v1(4603,4710) 4603,4974.57 v1(4685.43,5057) ; v1(4984.25,4983) 5015.75,5014.5 5015.75,5023.75 ; v1(4991,4999) 5015.75,5023.75 ; v1(5015.75,5307.76) 5015.75,5023.75 ; v1(5016,5291) 5016,5024 5015.75,5023.75
  Bottom Layer w7: v1(100,5015.75) 125,5040.75 125,5263.57 139,5277.57 ; OB1_U_OB_WRP1.VCC@160.43,243.86 v1(160.43,281) ; OB1_U_OB_WRP3.VCC@160.43,1148.86 v1(160.43,1186) ; OB1_U_OB_WRP9.VCC@243.86,5314.57 176,5314.57 139,5277.57 ; v1(365,4379) 0.1uF_1_U_VT_WRP6.1@365,4475 602,4475 641,4514 726,4514 0.1uF_1_U_VT_WRP7.1@765,4475 ; v1(459.25,167.24) 613.01,321 752,321 789.57,358.57 OB1_U_OB_WRP2.VCC@789.57,476.14 789.57,505.57 959.95,505.57 1035.5,581.11 1072.89,581.11 1086,568 1086,509 975,398 v1(975,380) 0.1uF_1_U_VT_WRP10.1@975,345 v1(1039,345) ; v1(459.25,1001.86) 473.61,987.5 550.5,987.5 564.57,973.43 COUNTER1_U_COUNTER_WRP1.VCC@564.57,933.64 ; v1(490.75,550.25) 647.5,707 942,707 0.1uF_1_U_VT_WRP11.1@975,740 ; v1(514,4701.43) 514,4695.43 504,4685.43 OB1_U_OB_WRP10.VCC@476.14,4685.43 368,4685.43 325,4728.43 325,4840 276,4889 212.13,4889 139,4962.13 139,5277.57 ; v1(765,4379) 0.1uF_1_U_VT_WRP7.1@765,4475 ; OB1_U_OB_WRP4.VCC@789.57,1381.14 789.57,1426 903.57,1540 0.1uF_1_U_VT_WRP13.1@975,1540 ; v1(807,4433) 0.1uF_1_U_VT_WRP7.1@765,4475 ; v1(807,4475) 0.1uF_1_U_VT_WRP7.1@765,4475 ; v1(810,3587.5) ETH1_U_BOTTOM_HEADER_WRP3.22@1028.54,3587.5 1077.5,3587.5 v1(1210,3720) ; COUNTER1_U_COUNTER_WRP3.VCC@933.64,4910.43 v1(977,4910.43) ; v1(941.5,773.5) 0.1uF_1_U_VT_WRP11.1@975,740 ; v1(959,1175) 975,1175 0.1uF_1_U_VT_WRP12.1@975,1140 v1(1146,1140) ; v1(971,5314.57) OB1_U_OB_WRP11.VCC@1168.86,5314.57 ; v1(975,706.5) 0.1uF_1_U_VT_WRP11.1@975,740 ; v1(975,1575) 0.1uF_1_U_VT_WRP13.1@975,1540 ; v1(1019.88,739.57) 1019.45,740 0.1uF_1_U_VT_WRP11.1@975,740 ; v1(1146,740) 1222,816 3726,816 0.1uF_1_U_VT_WRP16.1@3910,1000 ; v1(1146,1540) 0.1uF_1_U_VT_WRP13.1@975,1540 ; v1(1164.57,4273) 1165,4273.43 0.1uF_1_U_VT_WRP8.1@1165,4475 v1(1200,4440) v1(1210,4430) ; v1(1210,3865) v1(4329,3865) ; OB1_U_OB_WRP12.VCC@1401.14,4685.43 1455,4685.43 ; v1(1455,4653) 1455,4685.43 ; v1(1470,4685.43) 1455,4685.43 ; v1(1530,4440) 0.1uF_1_U_VT_WRP9.1@1565,4475 ; v1(3910.43,1074.38) 3910,1073.94 0.1uF_1_U_VT_WRP16.1@3910,1000 ; v1(3929,965) 3932.5,968.5 3932.5,977.5 0.1uF_1_U_VT_WRP16.1@3910,1000 ; v1(4046,815) 4046,799.57 4056,789.57 OB1_U_OB_WRP8.VCC@4083.86,789.57 ; v1(4275,965) 0.1uF_1_U_VT_WRP15.1@4310,1000 v1(4345,965) ; v1(4312.58,4710.43) 4328.58,4710.43 4329.15,4711 4500,4711 0.1uF_1_U_VT_WRP3.1@4500,4710 v1(4603,4710) ; OB1_U_OB_WRP7.VCC@4316.14,160.43 4334,160.43 4407.43,87 5115,87 5188.43,160.43 OB1_U_OB_WRP5.VCC@5231.14,160.43 5275,160.43 5390,275.43 5390,436 v1(5375,451) ; v1(4328.58,5110.43) 4329.15,5111 4500,5111 0.1uF_1_U_VT_WRP2.1@4500,5110 v1(4329,5110) ; v1(4329,4310) v1(4420,4310) 0.1uF_1_U_VT_WRP4.1@4500,4310 ; v1(4456,3910.43) 4456.43,3910 0.1uF_1_U_VT_WRP5.1@4500,3910 4465.5,3944.5 4465.5,4072 4509.5,4116 4685.43,4116 OB1_U_OB_WRP14.VCC@4685.43,4083.86 ; v1(4504,554.57) COUNTER1_U_COUNTER_WRP2.VCC@4541.36,554.57 4576,554.57 4811,789.57 OB1_U_OB_WRP6.VCC@4992,789.57 ; v1(4675,965) 0.1uF_1_U_VT_WRP14.1@4710,1000 ; v1(4685.43,5057) OB1_U_OB_WRP15.VCC@4685.43,5018.86 4685.43,4955.57 4741,4900 ; v1(4710,1096) 0.1uF_1_U_VT_WRP14.1@4710,1000 ; v1(4745,965) 0.1uF_1_U_VT_WRP14.1@4710,1000 ; v1(4961,806) 4975.57,806 OB1_U_OB_WRP6.VCC@4992,789.57 ; v1@4984.25,4836 5062,4836 5089.57,4808.43 COUNTER1_U_COUNTER_WRP4.VCC@5089.57,4773.64 5089.57,4634 5157,4566.57 5157,4488 5125,4456 5062.99,4456 v1(4999.75,4392.76) ; v1(4984.25,4837.25) 4971,4824 4941,4824 4932,4833 4808,4833 4741,4900 ; v1(4991,4999) 4944.5,4952.5 4908.89,4952.5 4900,4943.61 4900,4936 4864,4900 4741,4900 ; OB1_U_OB_WRP6.VCC@4998.86,789.57 OB1_U_OB_WRP6.VCC@4992,789.57 ; v1(5075,965) 0.1uF_1_U_VT_WRP1.1@5110,1000 ; v1(5110,967) 0.1uF_1_U_VT_WRP1.1@5110,1000 ; v1(5110,1096) 0.1uF_1_U_VT_WRP1.1@5110,1000 ; OB1_U_OB_WRP13.VCC@5314.57,4316.14 5314.57,4165 v1(5330.57,4149) ; OB1_U_OB_WRP16.VCC@5314.57,5246.14 5314.57,5209.43 v1(5315,5209)
ADDRA_B0: COUNTER1_U_COUNTER_WRP4.ADDR0 SRAM1_U_SRAM_WRP7.ADDR0 SRAM1_U_SRAM_WRP8.ADDR0 | length 1189.9
  Top Layer w7: SRAM1_U_SRAM_WRP7.ADDR0@4795.28,3973.62 v1(4795.28,4007) ; v1(4795.28,4792) v1(4795.28,4806.54) SRAM1_U_SRAM_WRP8.ADDR0@4795.28,4888.62
  Mid-Layer 2 w7: v1(4795.28,4007) 4744.38,4007 4670,4081.38 4670,4681.26 v1(4795.28,4806.54)
  Bottom Layer w7: v1(4795.28,4792) 4806.78,4780.5 4910.43,4780.5 COUNTER1_U_COUNTER_WRP4.ADDR0@4910.43,4773.64
ADDRA_B1: COUNTER1_U_COUNTER_WRP4.ADDR1 SRAM1_U_SRAM_WRP7.ADDR1 SRAM1_U_SRAM_WRP8.ADDR1 | length 1643.8
  Top Layer w7: v1(4738.78,4839) 4763.78,4864 SRAM1_U_SRAM_WRP8.ADDR1@4763.78,4888.62 ; v1(4763.78,3940) SRAM1_U_SRAM_WRP7.ADDR1@4763.78,3973.62
  Mid-Layer 2 w7: v1(4738.78,4839) 4705,4839 4654,4788 4654,4049.78 v1(4763.78,3940)
  Bottom Layer w7: v1(4738.78,4839) 4706,4839 4654,4787 4654,4726 4779,4601 4919.02,4601 4936.02,4584 COUNTER1_U_COUNTER_WRP4.ADDR1@4936.02,4541.36
ADDRA_B2: COUNTER1_U_COUNTER_WRP4.ADDR2 SRAM1_U_SRAM_WRP7.ADDR2 SRAM1_U_SRAM_WRP8.ADDR2 | length 1804.7
  Top Layer w7: v1(4732.28,3881) SRAM1_U_SRAM_WRP7.ADDR2@4732.28,3973.62 ; v1(4732.28,4963) SRAM1_U_SRAM_WRP8.ADDR2@4732.28,4888.62 4732.28,4870 4722,4870 4722,4819 4921.85,4619.15 v1(4961.61,4619.15)
  Mid-Layer 2 w7: v1(4732.28,3881) 4641,3972.28 4641,4871.72 v1(4732.28,4963)
  Bottom Layer w7: COUNTER1_U_COUNTER_WRP4.ADDR2@4961.61,4541.36 v1(4961.61,4619.15)
ADDRA_B3: COUNTER1_U_COUNTER_WRP4.ADDR3 SRAM1_U_SRAM_WRP7.ADDR3 SRAM1_U_SRAM_WRP8.ADDR3 | length 1966.1
  Top Layer w7: v1(4668.79,4952) 4700.79,4920 SRAM1_U_SRAM_WRP8.ADDR3@4700.79,4888.62 v1(4700.79,4654.96) ; v1(4700.79,3851) SRAM1_U_SRAM_WRP7.ADDR3@4700.79,3973.62
  Mid-Layer 2 w7: v1(4668.79,4952) 4628,4911.21 4628,3923.79 v1(4700.79,3851)
  Bottom Layer w7: v1(4700.79,4654.96) 4798.33,4557.42 4813.58,4557.42 4870.8,4500.2 4976,4500.2 4987.2,4511.41 COUNTER1_U_COUNTER_WRP4.ADDR3@4987.2,4541.36
ADDRA_B4: COUNTER1_U_COUNTER_WRP4.ADDR4 SRAM1_U_SRAM_WRP7.ADDR4 SRAM1_U_SRAM_WRP8.ADDR4 | length 1412.8
  Top Layer w7: SRAM1_U_SRAM_WRP7.ADDR4@4669.29,3973.62 v1(4669.29,4007.58) ; v1(4669.29,4780) SRAM1_U_SRAM_WRP8.ADDR4@4669.29,4888.62
  Mid-Layer 1 w7: v1(4669.29,4007.58) 4771.86,4110.15 4771.86,4295.86 4813,4337 4871.59,4337 5022.39,4487.8 v1(5038.39,4487.8)
  Bottom Layer w7: v1(4669.29,4780) 4669.29,4741.43 4790.24,4620.49 4933.95,4620.49 4947.11,4633.65 5011.74,4633.65 5038.39,4607 COUNTER1_U_COUNTER_WRP4.ADDR4@5038.39,4541.36 v1(5038.39,4487.8)
ADDRA_B5: COUNTER1_U_COUNTER_WRP4.ADDR5 SRAM1_U_SRAM_WRP7.ADDR5 SRAM1_U_SRAM_WRP8.ADDR5 | length 1376.4
  Top Layer w7: SRAM1_U_SRAM_WRP7.ADDR5@4669.29,4426.38 4669.29,4592 ; SRAM1_U_SRAM_WRP8.ADDR5@4669.29,5341.38 4669.29,4983.24 4647,4960.95 4647,4668.29 4669.29,4646 4669.29,4592 ; v1(5055,4594) 4671.29,4594 4669.29,4592
  Bottom Layer w7: v1(5055,4594) 5063.98,4585.02 COUNTER1_U_COUNTER_WRP4.ADDR5@5063.98,4541.36
ADDRA_B6: COUNTER1_U_COUNTER_WRP4.ADDR6 SRAM1_U_SRAM_WRP7.ADDR6 SRAM1_U_SRAM_WRP8.ADDR6 | length 1593.6
  Top Layer w7: SRAM1_U_SRAM_WRP8.ADDR6@4700.79,5341.38 4700.79,5375 4656,5375 4634,5353 4634,4403 4645,4392 4692.79,4392 4700.79,4400 SRAM1_U_SRAM_WRP7.ADDR6@4700.79,4426.38 4700.79,4468 4796.79,4564 4925,4564 4937,4576 v1(5005,4576)
  Bottom Layer w7: v1(5005,4576) 5012.8,4576 COUNTER1_U_COUNTER_WRP4.ADDR6@5012.8,4541.36
ADDRA_B7: COUNTER1_U_COUNTER_WRP4.ADDR7 SRAM1_U_SRAM_WRP7.ADDR7 SRAM1_U_SRAM_WRP8.ADDR7 | length 1943.3
  Top Layer w7: SRAM1_U_SRAM_WRP8.ADDR7@4732.28,5341.38 4732.28,5368 4708.28,5392 4640,5392 4621,5373 4621,4393 4636,4378 4720,4378 4732.28,4390.28 SRAM1_U_SRAM_WRP7.ADDR7@4732.28,4426.38 4732.28,4466.28 4812,4546 5035,4546 5079,4590 5079,4646 v1(5012.8,4712.2)
  Bottom Layer w7: v1(5012.8,4712.2) COUNTER1_U_COUNTER_WRP4.ADDR7@5012.8,4773.64
ADDRA_B8: COUNTER1_U_COUNTER_WRP4.ADDR8 SRAM1_U_SRAM_WRP7.ADDR8 SRAM1_U_SRAM_WRP8.ADDR8 | length 1284.1
  Top Layer w7: SRAM1_U_SRAM_WRP7.ADDR8@5204.72,4426.38 v1(5204.72,4499) ; v1(5204.72,5308) SRAM1_U_SRAM_WRP8.ADDR8@5204.72,5341.38
  Mid-Layer 2 w7: v1(4969,4736) 4969,4905.24 5114.49,5050.74 5114.49,5217.77 v1(5204.72,5308) ; v1(4987,4736) 5017.58,4736 5032,4721.58 5151.42,4721.58 5193,4680 5193,4510.72 v1(5204.72,4499)
  Bottom Layer w7: v1(4969,4736) v1(4987,4736) ; v1(4987,4736) COUNTER1_U_COUNTER_WRP4.ADDR8@4987.2,4773.64 4987.2,4736.2 v1(4987,4736)
ADDRA_B9: COUNTER1_U_COUNTER_WRP4.ADDR9 SRAM1_U_SRAM_WRP7.ADDR9 SRAM1_U_SRAM_WRP8.ADDR9 | length 1296.2
  Top Layer w7: SRAM1_U_SRAM_WRP7.ADDR9@5236.22,4426.38 v1(5236.22,4460) ; SRAM1_U_SRAM_WRP8.ADDR9@5236.22,5341.38 v1(5236.22,5375)
  Mid-Layer 2 w7: v1(5236.22,4460) 5236.22,4685.78 5185,4737 5038.39,4737 5038.39,4859.65 5077.74,4899 5077.74,4964.74 5149.71,5036.71 5171.43,5036.71 5182.72,5048 5182.72,5069.72 5253,5140 5253,5358.22 v1(5236.22,5375)
  Bottom Layer w7: 5038.39,4736.08 5038.39,4737 COUNTER1_U_COUNTER_WRP4.ADDR9@5038.39,4773.64
ADDRA_B10: COUNTER1_U_COUNTER_WRP4.ADDR10 SRAM1_U_SRAM_WRP7.ADDR10 SRAM1_U_SRAM_WRP8.ADDR10 | length 1925.5
  Top Layer w7: SRAM1_U_SRAM_WRP7.ADDR10@5267.72,4426.38 5267.72,4400 ; SRAM1_U_SRAM_WRP8.ADDR10@5267.72,5341.38 5267.72,5099.28 5353,5014 5353,4400 5345,4392 5275.72,4392 5267.72,4400 ; v1(5268,4393) 5267.72,4393.28 5267.72,4400
  Mid-Layer 2 w7: v1(5064,4811) 5103,4850 5103,4889 5160,4946 5183,4946 5268,4861 v1(5268,4393)
  Bottom Layer w7: COUNTER1_U_COUNTER_WRP4.ADDR10@5063.98,4773.64 v1(5064,4811)
ADDRA_B11: COUNTER1_U_COUNTER_WRP4.ADDR11 SRAM1_U_SRAM_WRP7.ADDR11 SRAM1_U_SRAM_WRP8.ADDR11 | length 1972.4
  Top Layer w7: v1(5090,4504.43) 5090,4552 v1(5304,4766) ; SRAM1_U_SRAM_WRP7.ADDR11@5299.21,4426.38 v1(5299.21,4460) ; v1(5299.21,5191) SRAM1_U_SRAM_WRP8.ADDR11@5299.21,5341.38 v1(5299.21,5375)
  Mid-Layer 2 w7: v1(5299.21,4460) 5330,4490.79 5330,5344.21 v1(5299.21,5375) ; v1(5299.21,5191) 5304,5186.21 v1(5304,4766)
  Bottom Layer w7: COUNTER1_U_COUNTER_WRP4.ADDR11@5089.57,4541.36 5089.57,4504.87 v1(5090,4504.43)
ADDRB_B0: COUNTER1_U_COUNTER_WRP3.ADDR0 SRAM1_U_SRAM_WRP5.ADDR0 SRAM1_U_SRAM_WRP6.ADDR0 | length 1987.4
  Top Layer w7: SRAM1_U_SRAM_WRP5.ADDR0@586.38,4795.28 v1(620,4795.28) ; SRAM1_U_SRAM_WRP6.ADDR0@1511.38,4795.28 1536,4795.28 ; v1(1545,4748.12) 1545,4786.28 1536,4795.28 ; v1(1545,4835.12) 1545,4804.28 1536,4795.28
  Mid-Layer 1 w7: v1(620,4795.28) 628.78,4786.5 1379.62,4786.5 1418,4748.12 v1(1545,4748.12) ; v1(865,5073.57) 865,5032 881,5016 1001.75,5016 1016,5030.25 1039.5,5030.25 1158.68,4911.07 1469.05,4911.07 v1(1545,4835.12)
  Bottom Layer w7: v1(865,5073.57) 881,5089.57 COUNTER1_U_COUNTER_WRP3.ADDR0@933.64,5089.57
ADDRB_B1: COUNTER1_U_COUNTER_WRP3.ADDR1 SRAM1_U_SRAM_WRP5.ADDR1 SRAM1_U_SRAM_WRP6.ADDR1 | length 1511.1
  Top Layer w7: v1(546,4787) 546,4776 v1(552.76,4763.78) SRAM1_U_SRAM_WRP5.ADDR1@586.38,4763.78 ; v1(1469.67,4763.78) SRAM1_U_SRAM_WRP6.ADDR1@1511.38,4763.78
  Mid-Layer 1 w7: v1(546,4787) 538,4795 538,4936 587.75,4985.75 649,4985.75 649,5002 677.02,5002 v1(739,5063.98) ; v1(552.76,4763.78) 601.48,4812.5 1104.5,4812.5 1117.5,4799.5 1433.95,4799.5 v1(1469.67,4763.78)
  Bottom Layer w7: COUNTER1_U_COUNTER_WRP3.ADDR1@701.36,5063.98 v1(739,5063.98)
ADDRB_B2: COUNTER1_U_COUNTER_WRP3.ADDR2 SRAM1_U_SRAM_WRP5.ADDR2 SRAM1_U_SRAM_WRP6.ADDR2 | length 2215
  Top Layer w7: SRAM1_U_SRAM_WRP5.ADDR2@586.38,4732.28 665,4732.28 v1(684.78,4712.5) ; SRAM1_U_SRAM_WRP6.ADDR2@1511.38,4732.28 1536,4732.28 ; v1(1545,4681) v1(1545,4693.11) 1545,4723.28 ; 1536,4732.28 1544.72,4732.28 1545,4732 1545,4723.28 ; 1536,4732.28 1545,4723.28
  Mid-Layer 1 w7: v1(684.78,4712.5) 1070.5,4712.5 1096,4687 1321.5,4687 1325.95,4682.55 1376.5,4682.55 1380.95,4687 1446,4687 1463.5,4669.5 1521.39,4669.5 v1(1545,4693.11)
  Bottom Layer w7: COUNTER1_U_COUNTER_WRP3.ADDR2@701.36,5038.39 730,5038.39 923.39,4845 1002,4845 1058,4789 1058,4653 1088,4623 1487,4623 v1(1545,4681)
ADDRB_B3: COUNTER1_U_COUNTER_WRP3.ADDR3 SRAM1_U_SRAM_WRP5.ADDR3 SRAM1_U_SRAM_WRP6.ADDR3 | length 2982.6
  Top Layer w7: v1(553,4747) v1(553,4701) 553.21,4700.79 SRAM1_U_SRAM_WRP5.ADDR3@586.38,4700.79 ; v1(1462,4700.79) SRAM1_U_SRAM_WRP6.ADDR3@1511.38,4700.79
  Mid-Layer 1 w7: v1(553,4747) 616.72,4747 624.22,4754.5 1094,4754.5 1116.8,4731.7 1155.62,4731.7 1181.21,4706.11 1323.93,4706.11 1334.5,4695.55 1358.26,4695.55 1363.5,4700.79 v1(1462,4700.79)
  Mid-Layer 2 w7: v1(553,4701) 537,4717 504,4717 483,4696 483,4374 585,4272 814,4272 822,4280 822,4774 714,4882 714,5064 666,5112 613,5112 605,5104 605,5088 634.5,5058.5 634.5,5026.5 v1(645,5016)
  Bottom Layer w7: v1(645,5016) 648.2,5012.8 COUNTER1_U_COUNTER_WRP3.ADDR3@701.36,5012.8
ADDRB_B4: COUNTER1_U_COUNTER_WRP3.ADDR4 SRAM1_U_SRAM_WRP5.ADDR4 SRAM1_U_SRAM_WRP6.ADDR4 | length 1295.8
  Top Layer w7: SRAM1_U_SRAM_WRP5.ADDR4@586.38,4669.29 v1(620,4669.29) v1(620,4654.93) ; v1(1440.2,4669.29) SRAM1_U_SRAM_WRP6.ADDR4@1511.38,4669.29
  Mid-Layer 1 w7: v1(620,4654.93) 1425.84,4654.93 v1(1440.2,4669.29)
  Bottom Layer w7: v1(620,4669.29) 635,4684.29 635,4937 659.61,4961.61 COUNTER1_U_COUNTER_WRP3.ADDR4@701.36,4961.61
ADDRB_B5: COUNTER1_U_COUNTER_WRP3.ADDR5 SRAM1_U_SRAM_WRP5.ADDR5 SRAM1_U_SRAM_WRP6.ADDR5 | length 1915.5
  Top Layer w7: SRAM1_U_SRAM_WRP5.ADDR5@133.62,4669.29 252.56,4669.29 455,4466.85 455,4336 510,4281 832,4281 879,4328 879,4598.29 950,4669.29 ; v1(664,4936.02) 930.73,4669.29 950,4669.29 ; SRAM1_U_SRAM_WRP6.ADDR5@1058.62,4669.29 950,4669.29
  Bottom Layer w7: v1(664,4936.02) COUNTER1_U_COUNTER_WRP3.ADDR5@701.36,4936.02
ADDRB_B6: COUNTER1_U_COUNTER_WRP3.ADDR6 SRAM1_U_SRAM_WRP5.ADDR6 SRAM1_U_SRAM_WRP6.ADDR6 | length 1522.7
  Top Layer w7: v1(100,4701) 100.21,4700.79 SRAM1_U_SRAM_WRP5.ADDR6@133.62,4700.79 ; v1(664,4987) 683,4987 969.21,4700.79 1025,4700.79 ; v1(1009,4684.79) 1025,4700.79 ; SRAM1_U_SRAM_WRP6.ADDR6@1058.62,4700.79 1025,4700.79
  Mid-Layer 1 w7: v1(100,4701) 116.21,4684.79 v1(1009,4684.79)
  Bottom Layer w7: v1(664,4987) 664.2,4987.2 COUNTER1_U_COUNTER_WRP3.ADDR6@701.36,4987.2
ADDRB_B7: COUNTER1_U_COUNTER_WRP3.ADDR7 SRAM1_U_SRAM_WRP5.ADDR7 SRAM1_U_SRAM_WRP6.ADDR7 | length 1359.7
  Top Layer w7: SRAM1_U_SRAM_WRP5.ADDR7@133.62,4732.28 v1(195.72,4732.28) ; SRAM1_U_SRAM_WRP6.ADDR7@1058.62,4732.28 v1(1092.24,4732.28)
  Mid-Layer 1 w7: v1(195.72,4732.28) 211,4717 631.5,4717 656,4741.5 1083.03,4741.5 v1(1092.24,4732.28)
  Bottom Layer w7: COUNTER1_U_COUNTER_WRP3.ADDR7@933.64,4987.2 958,4987.2 994,4951.2 994,4935 1024,4905 1045,4905 1092.24,4857.76 v1(1092.24,4732.28)
ADDRB_B8: COUNTER1_U_COUNTER_WRP3.ADDR8 SRAM1_U_SRAM_WRP5.ADDR8 SRAM1_U_SRAM_WRP6.ADDR8 | length 2196.8
  Top Layer w7: SRAM1_U_SRAM_WRP5.ADDR8@133.62,5204.72 v1(296,5204.72) ; v1(971,4997) 956,5012 956,5352 999,5395 1254,5395 1384,5265 1384,5252.36 1365.64,5234 1112.8,5234 1083.52,5204.72 SRAM1_U_SRAM_WRP6.ADDR8@1058.62,5204.72 v1(1025,5204.72)
  Mid-Layer 1 w7: v1(296,5204.72) v1(1025,5204.72)
  Bottom Layer w7: COUNTER1_U_COUNTER_WRP3.ADDR8@933.64,5012.8 971,5012.8 v1(971,4997)
ADDRB_B9: COUNTER1_U_COUNTER_WRP3.ADDR9 SRAM1_U_SRAM_WRP5.ADDR9 SRAM1_U_SRAM_WRP6.ADDR9 | length 3086.9
  Top Layer w7: SRAM1_U_SRAM_WRP5.ADDR9@133.62,5236.22 167,5236.22 v1(177.78,5247) ; SRAM1_U_SRAM_WRP6.ADDR9@1058.62,5236.22 1092,5236.22 1092.12,5236.1
  Mid-Layer 1 w7: v1(177.78,5247) 189.78,5247 214.78,5222 1078.02,5222 1092.12,5236.1 1101,5227.22 1101,5204 1112,5193 1122,5193 1181,5252 1297,5252 1323,5278 1405,5278 1421,5262 1537,5262 1575,5224 1575,5157 1481,5063 1014,5063 978,5099 807,5099 679,4971 617.5,4971 617.5,4941.5 630.5,4941.5 651,4921 711,4921 751.61,4961.61 v1(880,4961.61)
  Bottom Layer w7: v1(880,4961.61) COUNTER1_U_COUNTER_WRP3.ADDR9@933.64,4961.61